# Allegro board pc049a_toplevel_01.brd
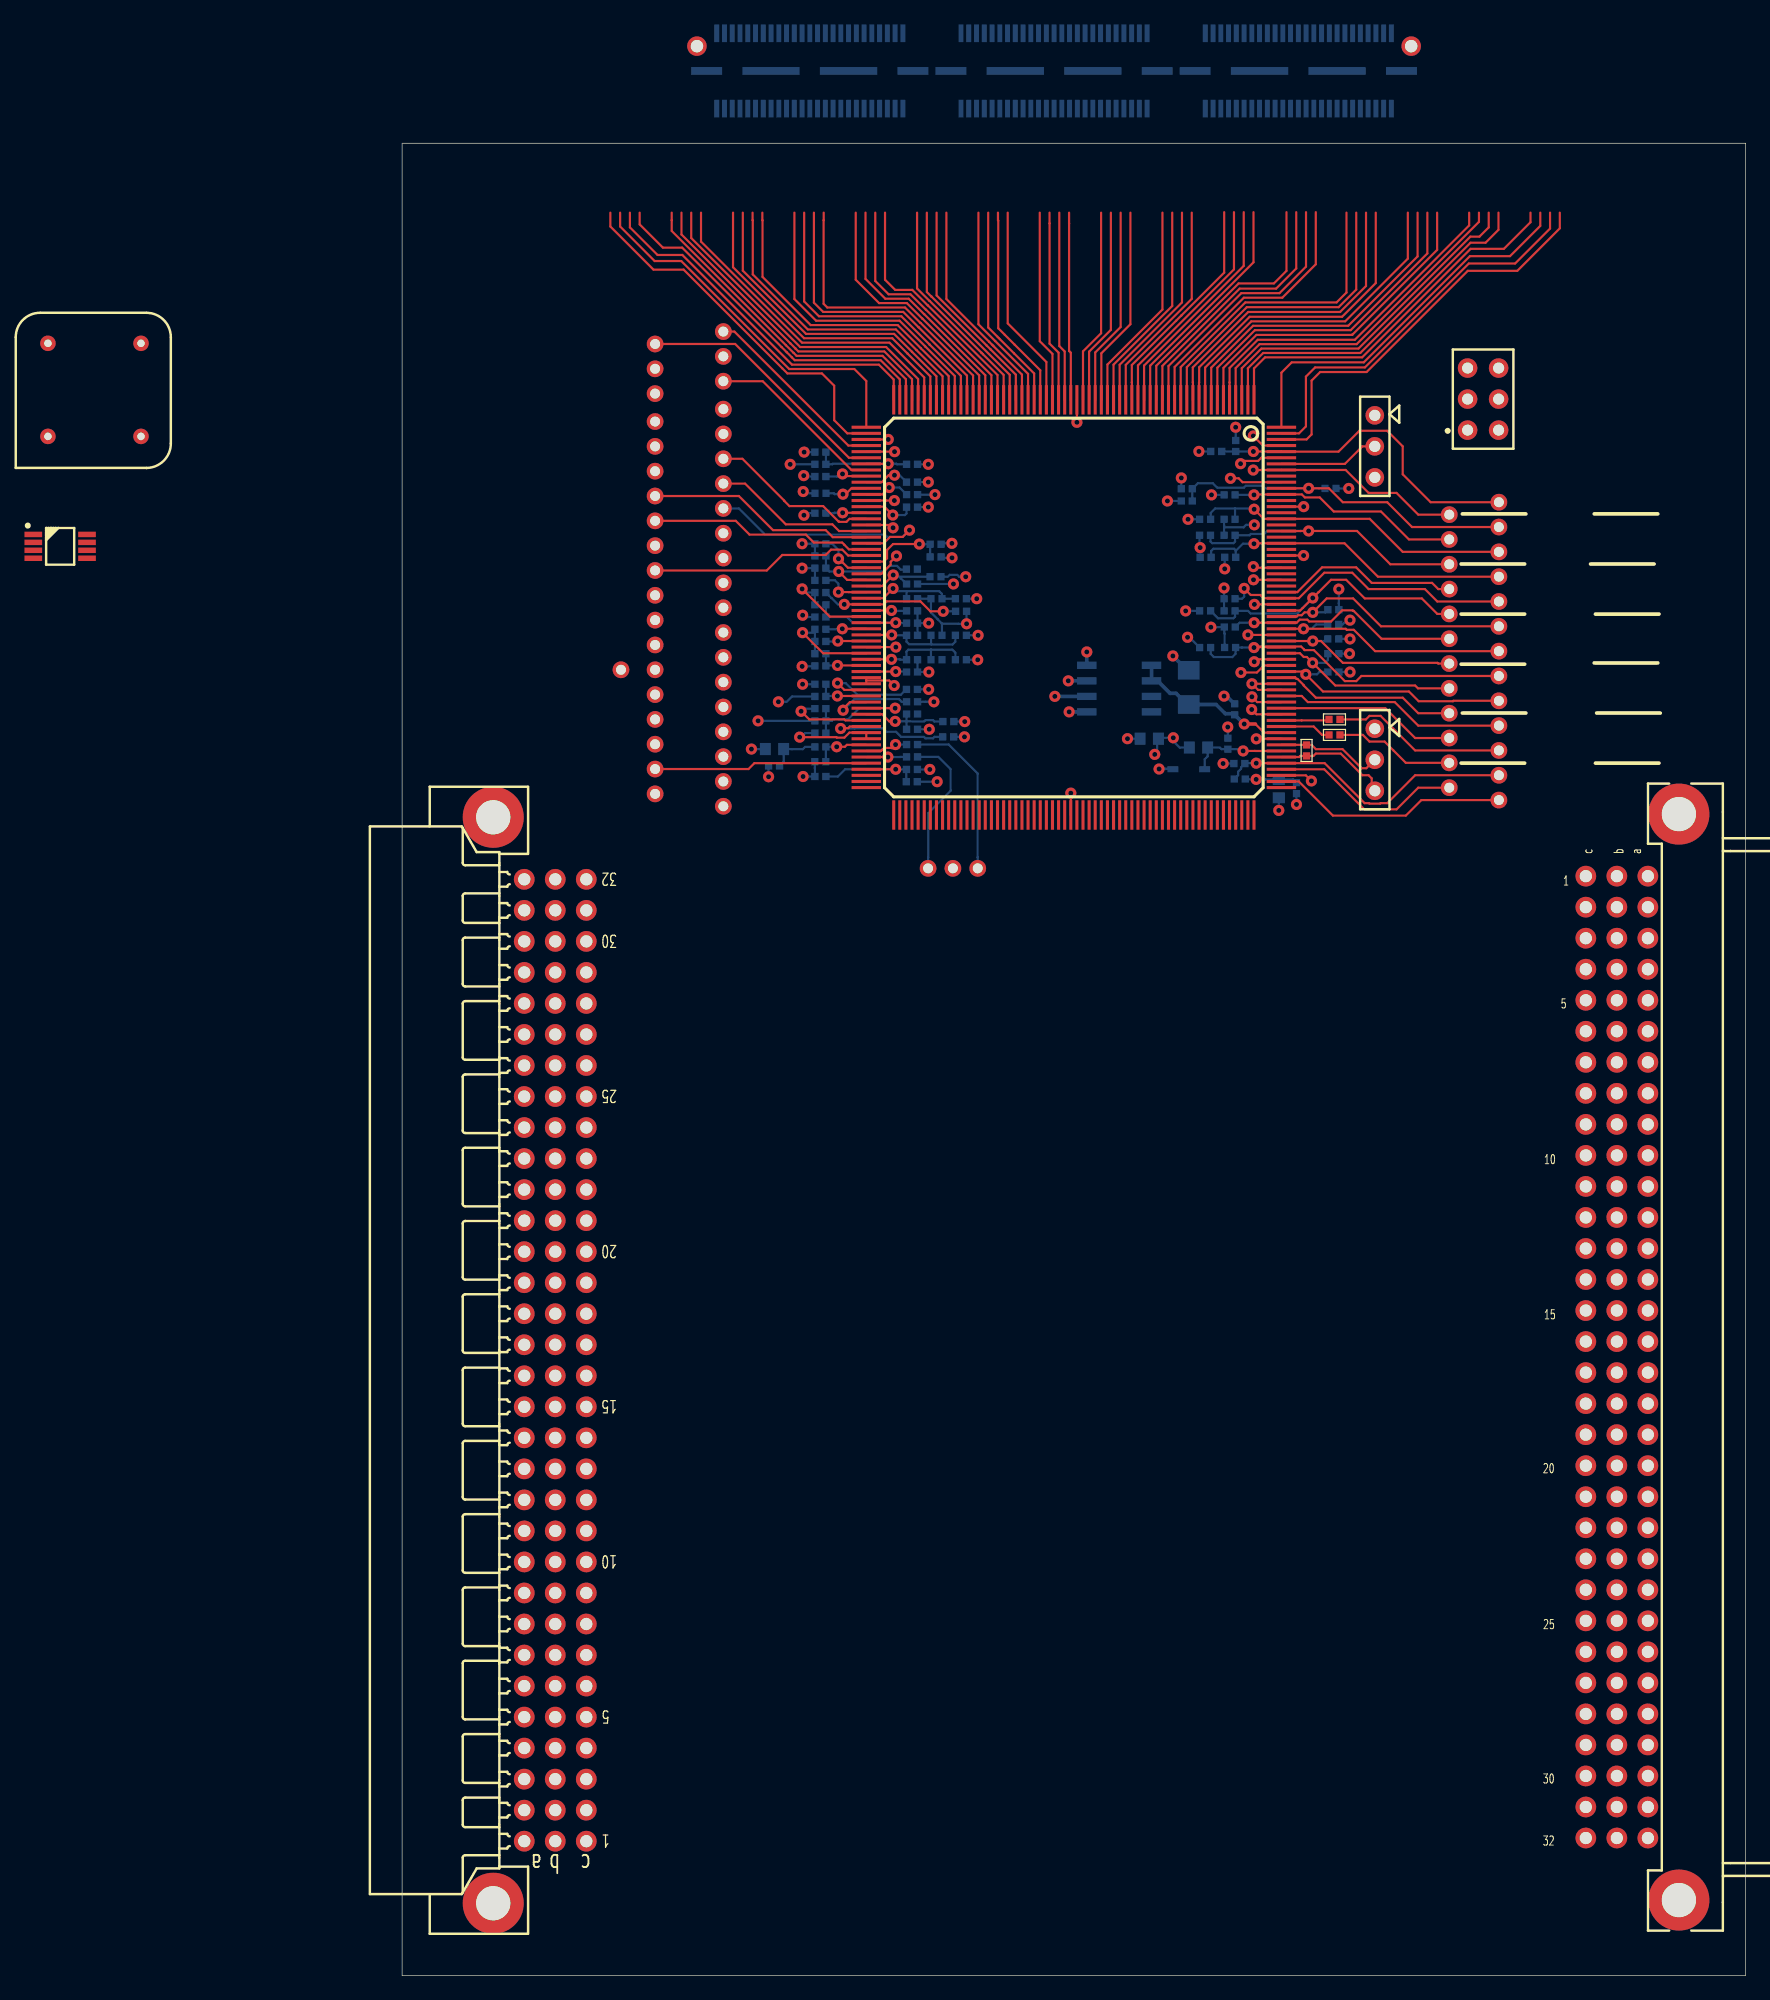
[diagram p0: board, top side]
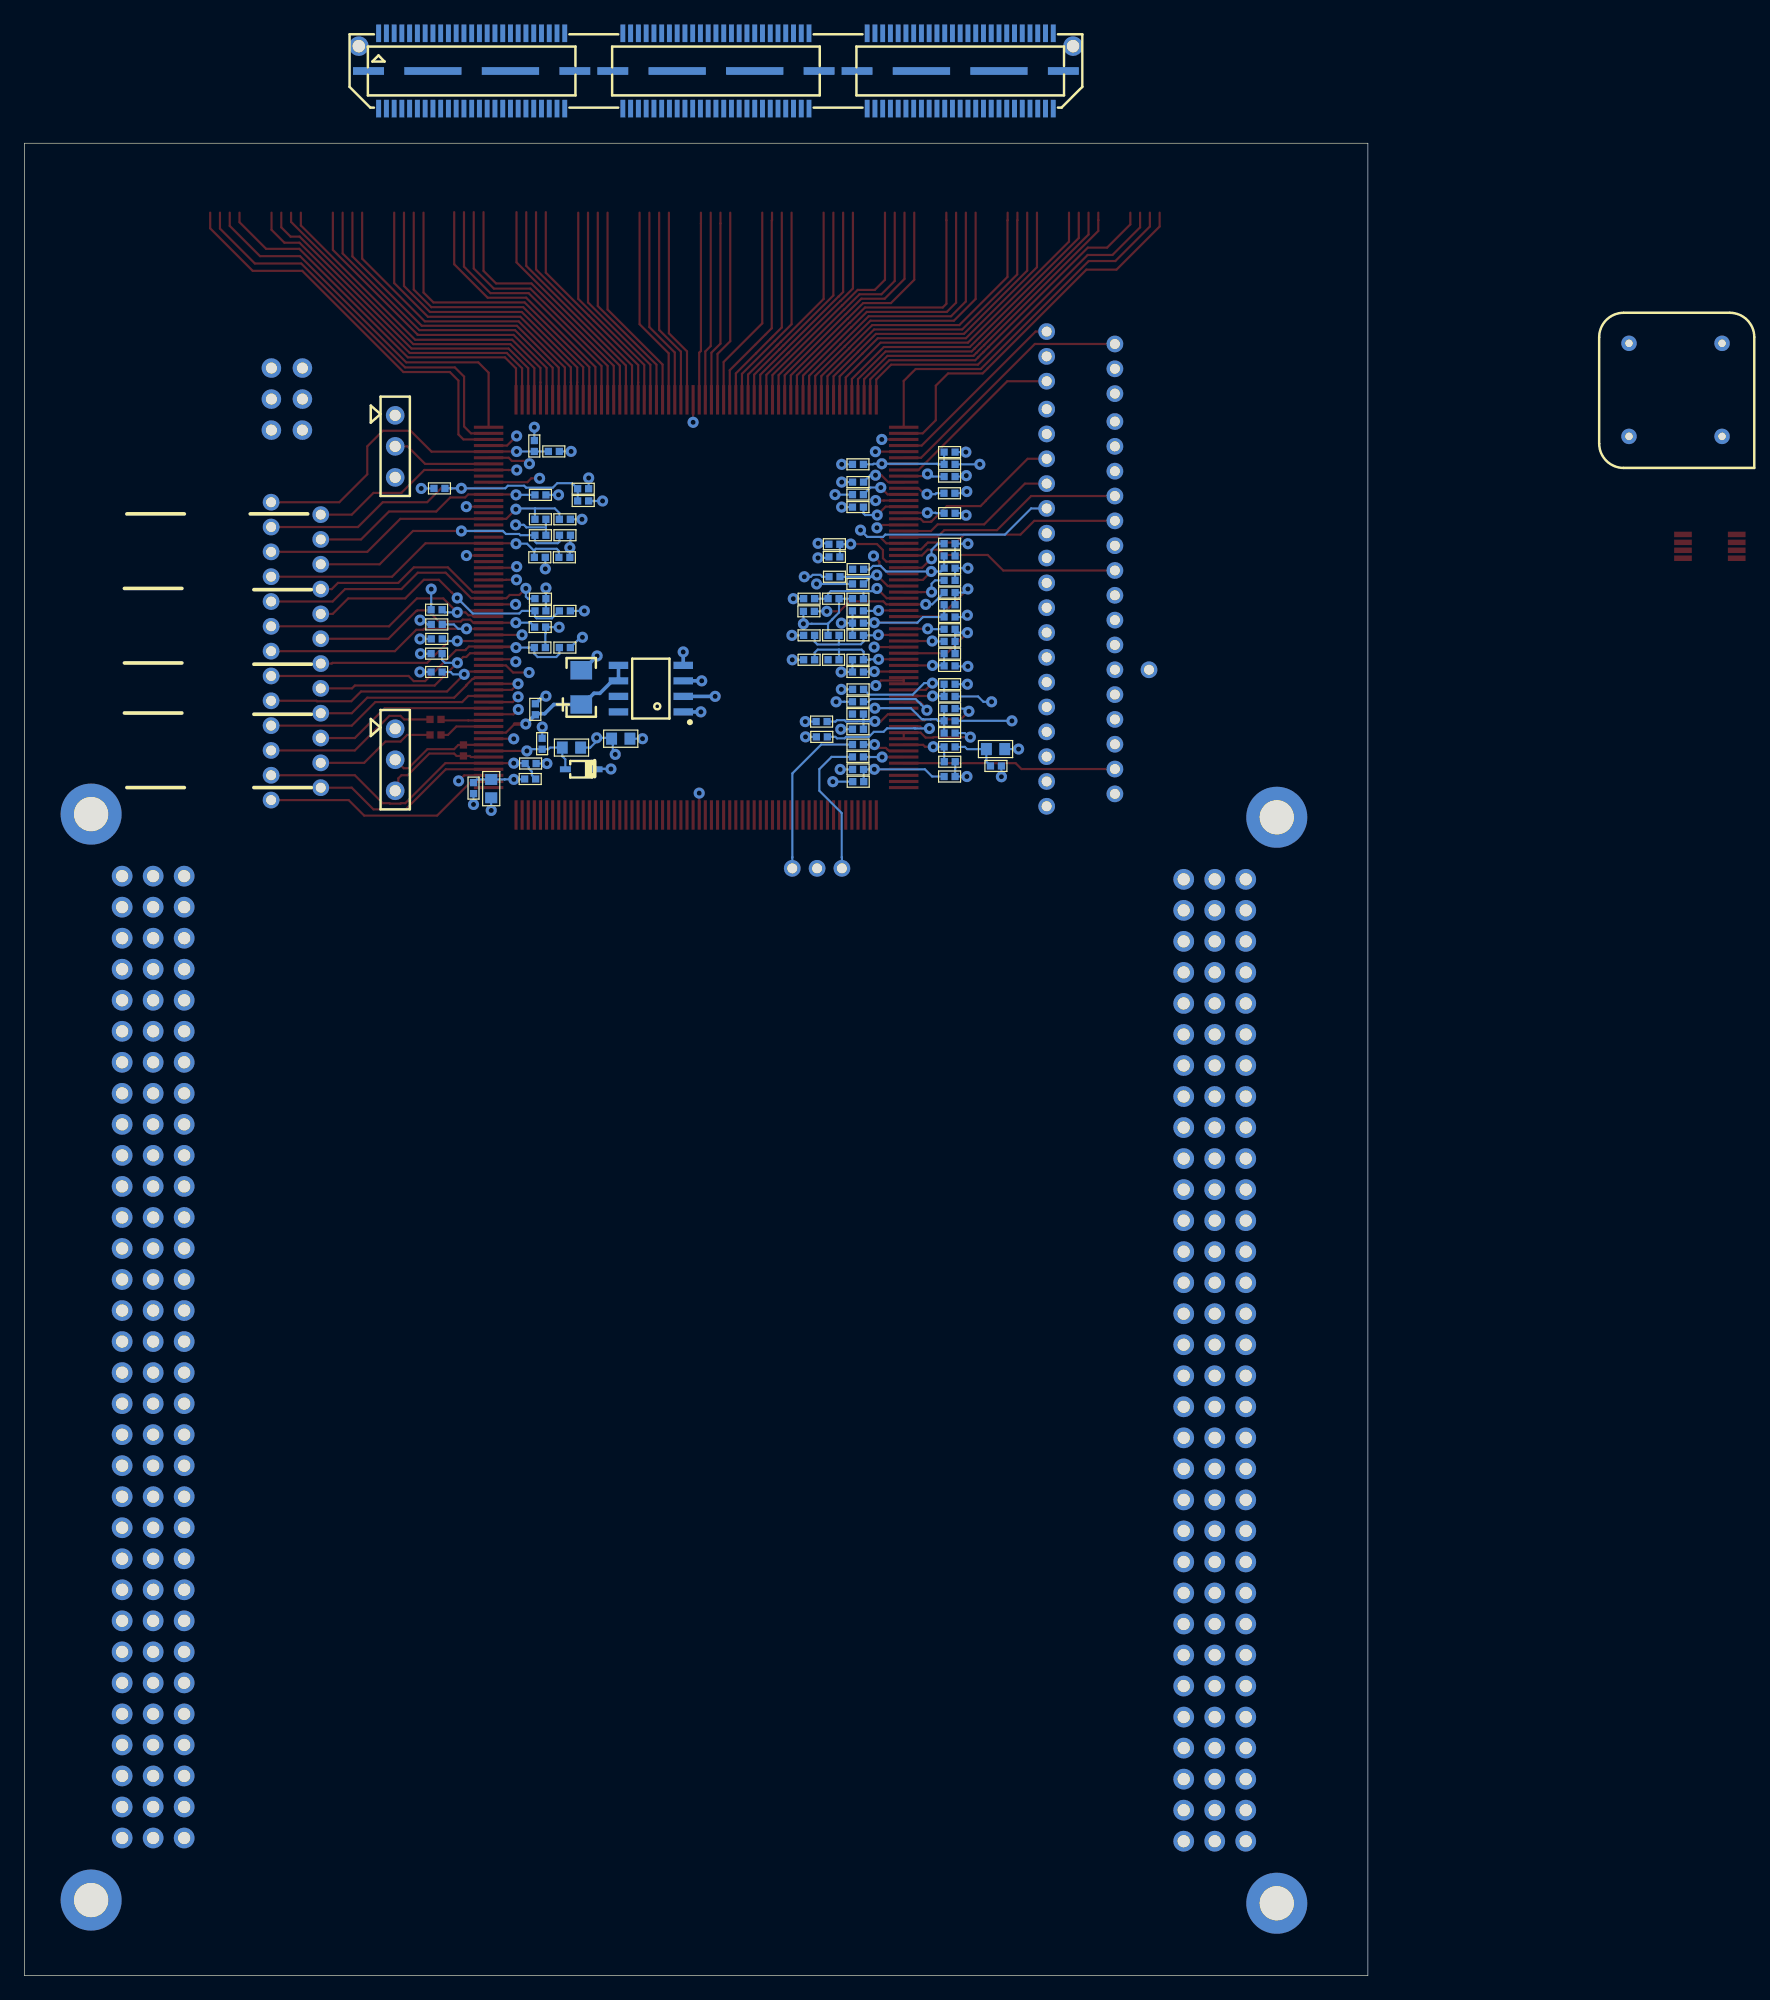
[diagram p1: board, bottom side, seen from below]

Outline 110 x 150 mm; copper layers: TOP, L2, L3, L4, L5, BOTTOM. Coordinates in mm from the lower left corner of the outline.
Outline path: 0,150 110,150 110,0 0,0 0,150

## Design rules (mm)
net group OR: nets OR<0>_1 OR<1>_1
net group ANALOG_TO_MAROC: nets ANALOG_TO_MAROC<0> ANALOG_TO_MAROC<1> ANALOG_TO_MAROC<2> ANALOG_TO_MAROC<3> ANALOG_TO_MAROC<4> ANALOG_TO_MAROC<5> ANALOG_TO_MAROC<6> ANALOG_TO_MAROC<7> ANALOG_TO_MAROC<8> ANALOG_TO_MAROC<9> ANALOG_TO_MAROC<10> ANALOG_TO_MAROC<11> ANALOG_TO_MAROC<12> ANALOG_TO_MAROC<13> ANALOG_TO_MAROC<14> ANALOG_TO_MAROC<15> ANALOG_TO_MAROC<16> ANALOG_TO_MAROC<17> ANALOG_TO_MAROC<18> ANALOG_TO_MAROC<19> ANALOG_TO_MAROC<20> ANALOG_TO_MAROC<21> ANALOG_TO_MAROC<22> ANALOG_TO_MAROC<23> ANALOG_TO_MAROC<24> ANALOG_TO_MAROC<25> ANALOG_TO_MAROC<26> ANALOG_TO_MAROC<27> ANALOG_TO_MAROC<28> ANALOG_TO_MAROC<29> ANALOG_TO_MAROC<30> ANALOG_TO_MAROC<31> ANALOG_TO_MAROC<32> ANALOG_TO_MAROC<33> ANALOG_TO_MAROC<34> ANALOG_TO_MAROC<35> ANALOG_TO_MAROC<36> ANALOG_TO_MAROC<37> ANALOG_TO_MAROC<38> ANALOG_TO_MAROC<39> ANALOG_TO_MAROC<40> ANALOG_TO_MAROC<41> ANALOG_TO_MAROC<42> ANALOG_TO_MAROC<43> ANALOG_TO_MAROC<44> ANALOG_TO_MAROC<45> ANALOG_TO_MAROC<46> ANALOG_TO_MAROC<47> ANALOG_TO_MAROC<48> ANALOG_TO_MAROC<49> ANALOG_TO_MAROC<50> ANALOG_TO_MAROC<51> ANALOG_TO_MAROC<52> ANALOG_TO_MAROC<53> ANALOG_TO_MAROC<54> ANALOG_TO_MAROC<55> ANALOG_TO_MAROC<56> ANALOG_TO_MAROC<57> ANALOG_TO_MAROC<58> ANALOG_TO_MAROC<59> ANALOG_TO_MAROC<60> ANALOG_TO_MAROC<61> ANALOG_TO_MAROC<62> ANALOG_TO_MAROC<63>
net group LVDS_DIN_N: nets LVDS_DIN_N<0> LVDS_DIN_N<1> LVDS_DIN_N<2> LVDS_DIN_N<3> LVDS_DIN_N<4> LVDS_DIN_N<5> LVDS_DIN_N<6> LVDS_DIN_N<7> LVDS_DIN_N<8> LVDS_DIN_N<9> LVDS_DIN_N<10> LVDS_DIN_N<11> LVDS_DIN_N<12> LVDS_DIN_N<13> LVDS_DIN_N<14> LVDS_DIN_N<15>
net group LVDS_DIN_P: nets LVDS_DIN_P<0> LVDS_DIN_P<1> LVDS_DIN_P<2> LVDS_DIN_P<3> LVDS_DIN_P<4> LVDS_DIN_P<5> LVDS_DIN_P<6> LVDS_DIN_P<7> LVDS_DIN_P<8> LVDS_DIN_P<9> LVDS_DIN_P<10> LVDS_DIN_P<11> LVDS_DIN_P<12> LVDS_DIN_P<13> LVDS_DIN_P<14> LVDS_DIN_P<15>
net group SUM: nets SUM<1>_1 SUM<2>_1 SUM<3>_1 SUM<4>_1 SUM<5>_1 SUM<6>_1 SUM<7>_1 SUM<8>_1
net group TRIG: nets TRIG<0>_1 TRIG<1>_1 TRIG<2>_1 TRIG<3>_1 TRIG<4>_1 TRIG<5>_1 TRIG<6>_1 TRIG<7>_1 TRIG<8>_1 TRIG<9>_1 TRIG<10>_1 TRIG<11>_1 TRIG<12>_1 TRIG<13>_1 TRIG<14>_1 TRIG<15>_1 TRIG<16>_1 TRIG<17>_1 TRIG<18>_1 TRIG<19>_1 TRIG<20>_1 TRIG<21>_1 TRIG<22>_1 TRIG<23>_1 TRIG<24>_1 TRIG<25>_1 TRIG<26>_1 TRIG<27>_1 TRIG<28>_1 TRIG<29>_1 TRIG<30>_1 TRIG<31>_1 TRIG<32>_1 TRIG<33>_1 TRIG<34>_1 TRIG<35>_1 TRIG<36>_1 TRIG<37>_1 TRIG<38>_1 TRIG<39>_1 TRIG<40>_1 TRIG<41>_1 TRIG<42>_1 TRIG<43>_1 TRIG<44>_1 TRIG<45>_1 TRIG<46>_1 TRIG<47>_1 TRIG<48>_1 TRIG<49>_1 TRIG<50>_1 TRIG<51>_1 TRIG<52>_1 TRIG<53>_1 TRIG<54>_1 TRIG<55>_1 TRIG<56>_1 TRIG<57>_1 TRIG<58>_1 TRIG<59>_1 TRIG<60>_1 TRIG<61>_1 TRIG<62>_1 TRIG<63>_1

## Placement (name value [footprint] x y rotation side)
C1_1  100nF  [C0402]  68.56 99.22 180 bottom
C2_1  100nF  [C0402]  34.24 99.37 0 bottom
C3_1  100nF  [C0402]  43.67 114.51 180 bottom
C4_1  100nF  [C0402]  68.25 125.21 270 bottom
C5_1  100nF  [C0402]  67.75 119.21 0 bottom
C6_1  100nF  [C0402]  34.25 124.71 0 bottom
C7_1  100nF  [C0402]  67.75 117.91 0 bottom
C8_1  100nF  [C0402]  34.25 123.71 0 bottom
C9_1  100nF  [C0402]  43.68 116.13 180 bottom
C10_1  100nF  [C0402]  67.8 116.1 0 bottom
C11_1  100nF  [C0402]  34.25 108.21 0 bottom
C12_1  100nF  [C0402]  67.75 111.71 0 bottom
C13_1  100nF  [C0402]  34.25 113.21 0 bottom
C14_1  100nF  [C0402]  34.25 105.71 0 bottom
C15_1  100nF  [C0402]  34.25 103.71 0 bottom
C16_1  100nF  [C0402]  67.79 108.72 0 bottom
C17_1  100nF  [C0402]  34.25 101.71 0 bottom
C18_1  100nF  [C0402]  34.25 122.71 0 bottom
C19_1  100nF  [C0402]  41.75 107.71 180 bottom
C20_1  100nF  [C0402]  34.25 119.71 0 bottom
C21_1  100nF  [C0402]  41.75 109.71 180 bottom
C22_1  100nF  [C0402]  34.25 114.21 0 bottom
C23_1  100nF  [C0402]  67.77 110.39 0 bottom
C24_1  100nF  [C0402]  34.25 116.21 0 bottom
C25_1  100nF  [C0402]  76.25 106.71 180 bottom
C26_1  100nF  [C0402]  34.25 109.21 0 bottom
C27_1  100nF  [C0402]  41.75 111.71 180 bottom
C28_1  100nF  [C0402]  41.75 120.21 180 bottom
C29_1  100nF  [C0402]  41.75 112.71 0 bottom
C30_1  100nF  [C0402]  41.75 104.27 180 bottom
C31_1  100nF  [C0402]  76.25 111.81 180 bottom
C32_1  100nF  [C0402]  41.75 122.26 180 bottom
C33_1  100nF  [C0402]  41.75 110.71 180 bottom
C34_1  100nF  [C0402]  44.73 102.65 180 bottom
C35_1  100nF  [C0402]  67.75 112.71 0 bottom
C36_1  100nF  [C0402]  41.76 121.23 180 bottom
C37_1  100nF  [C0402]  76.25 108.21 180 bottom
C38_1  100nF  [C0402]  76.02 121.74 180 bottom
C39_1  100nF  [C0402]  34.26 121.34 0 bottom
C40_1  100nF  [C0402]  34.25 117.21 0 bottom
C41_1  100nF  [C0402]  41.75 106.71 180 bottom
C42_1  100nF  [C0402]  76.24 110.6 180 bottom
C43_1  100nF  [C0402]  67.75 121.21 0 bottom
C44_1  100nF  [C0402]  41.74 98.74 180 bottom
C45_1  100nF  [C0402]  41.74 105.29 180 bottom
C46_1  100nF  [C0402]  76.24 109.42 180 bottom
C47_1  100nF  [C0402]  34.25 110.21 0 bottom
C48_1  22uF  [C3216POL]  64.41 104.05 90 bottom
C50_1  100nF  [C0402]  67.61 100.84 270 bottom
C51_1  100nF  [C0402]  68.17 103.66 270 bottom
C52_1  10uF  [C0603]  71.78 97.17 90 bottom
C53_1  10uF  [C0603]  30.49 100.4 0 bottom
C54_1  10uF  [C0603]  61.17 101.25 0 bottom
D1_1  -  [SOD323_INV]  64.41 98.75 180 bottom
IC1  -  [SOP65P490X95-8N]  -28 117 0 top
J1  -  [CON150_QTSDA]  81 159 90 bottom
J1_1  -  [SAMTEC_SSW-103-01-G-D]  88.51 129.05 270 top
J2  -  [HARTING_0903196X921]  10 11 180 top
J3  -  [HARTING_09732966801]  102 90 0 top
J3_1  -  [CONHE13D3X1M]  79.64 102.07 270 top
J4_1  -  [CONHE13D3X1M]  79.64 127.72 270 top
LK1_1  -  [1-HOLE_0-8P]  89.8 98.26 0 top
LK2_1  -  [1-HOLE_0-8P]  26.3 99.78 0 top
LK3_1  -  [1-HOLE_0-8P]  20.71 123.15 0 top
LK4_1  -  [1-HOLE_0-8P]  89.8 120.61 0 top
LK5_1  -  [1-HOLE_0-8P]  89.8 116.55 0 top
LK6_1  -  [1-HOLE_0-8P]  85.74 119.6 0 top
LK7_1  -  [1-HOLE_0-8P]  85.74 115.53 0 top
LK8_1  -  [1-HOLE_0-8P]  20.71 125.18 0 top
LK9_1  -  [1-HOLE_0-8P]  89.8 114.52 0 top
LK10_1  -  [1-HOLE_0-8P]  85.74 111.47 0 top
LK11_1  -  [1-HOLE_0-8P]  20.71 112.99 0 top
LK12_1  -  [1-HOLE_0-8P]  26.3 105.88 0 top
LK13_1  -  [1-HOLE_0-8P]  89.8 106.39 0 top
LK14_1  -  [1-HOLE_0-8P]  20.71 102.83 0 top
LK15_1  -  [1-HOLE_0-8P]  26.3 97.75 0 top
LK16_1  -  [1-HOLE_0-8P]  26.3 128.23 0 top
LK17_1  -  [1-HOLE_0-8P]  20.71 104.86 0 top
LK18_1  -  [1-HOLE_0-8P]  26.3 126.2 0 top
LK19_1  -  [1-HOLE_0-8P]  26.3 107.91 0 top
LK20_1  -  [1-HOLE_0-8P]  26.3 114.01 0 top
LK21_1  -  [1-HOLE_0-8P]  85.74 109.44 0 top
LK22_1  -  [1-HOLE_0-8P]  20.71 117.06 0 top
LK23_1  -  [1-HOLE_0-8P]  89.8 104.36 0 top
LK24_1  -  [1-HOLE_0-8P]  20.71 108.93 0 top
LK25_1  -  [1-HOLE_0-8P]  26.3 111.98 0 top
LK26_1  -  [1-HOLE_0-8P]  89.8 96.23 0 top
LK27_1  -  [1-HOLE_0-8P]  20.71 106.9 0 top
LK28_1  -  [1-HOLE_0-8P]  89.8 102.32 0 top
LK29_1  -  [1-HOLE_0-8P]  85.74 101.31 0 top
LK30_1  -  [1-HOLE_0-8P]  17.92 106.9 0 top
LK31_1  -  [1-HOLE_0-8P]  20.71 129.5 0 top
LK32_1  -  [1-HOLE_0-8P]  26.3 116.04 0 top
LK33_1  -  [1-HOLE_0-8P]  26.3 101.82 0 top
LK34_1  -  [1-HOLE_0-8P]  89.8 110.45 0 top
LK35_1  -  [1-HOLE_0-8P]  26.3 132.55 0 top
LK36_1  -  [1-HOLE_0-8P]  20.71 110.96 0 top
LK37_1  -  [1-HOLE_0-8P]  20.71 96.74 0 top
LK38_1  -  [1-HOLE_0-8P]  89.8 112.48 0 top
LK39_1  -  [1-HOLE_0-8P]  20.71 131.53 0 top
LK40_1  -  [1-HOLE_0-8P]  85.74 105.37 0 top
LK41_1  -  [1-HOLE_0-8P]  89.8 118.58 0 top
LK42_1  -  [1-HOLE_0-8P]  20.71 127.22 0 top
LK43_1  -  [1-HOLE_0-8P]  26.3 118.07 0 top
LK44_1  -  [1-HOLE_0-8P]  20.71 100.8 0 top
LK45_1  -  [1-HOLE_0-8P]  89.8 108.42 0 top
LK46_1  -  [1-HOLE_0-8P]  85.74 117.56 0 top
LK47_1  -  [1-HOLE_0-8P]  26.3 95.72 0 top
LK48_1  -  [1-HOLE_0-8P]  26.3 103.85 0 top
LK49_1  -  [1-HOLE_0-8P]  85.74 107.4 0 top
LK50_1  -  [1-HOLE_0-8P]  26.3 109.94 0 top
LK51_1  -  [1-HOLE_0-8P]  85.74 99.28 0 top
LK52_1  -  [1-HOLE_0-8P]  89.8 100.29 0 top
LK53_1  -  [1-HOLE_0-8P]  26.3 120.1 0 top
LK54_1  -  [1-HOLE_0-8P]  43.07 90.64 0 top
LK55_1  -  [1-HOLE_0-8P]  45.1 90.64 0 top
LK56_1  -  [1-HOLE_0-8P]  47.13 90.64 0 top
LK57_1  -  [1-HOLE_0-8P]  26.3 130.52 0 top
LK58_1  -  [1-HOLE_0-8P]  85.74 113.5 0 top
LK59_1  -  [1-HOLE_0-8P]  20.71 98.77 0 top
LK60_1  -  [1-HOLE_0-8P]  26.3 134.58 0 top
LK61_1  -  [1-HOLE_0-8P]  26.3 124.17 0 top
LK62_1  -  [1-HOLE_0-8P]  20.71 121.12 0 top
LK63_1  -  [1-HOLE_0-8P]  85.74 103.34 0 top
LK64_1  -  [1-HOLE_0-8P]  26.3 122.14 0 top
LK65_1  -  [1-HOLE_0-8P]  20.71 119.09 0 top
LK66_1  -  [1-HOLE_0-8P]  20.71 133.57 0 top
LK67_1  -  [1-HOLE_0-8P]  20.71 115.02 0 top
LK68_1  -  [1-HOLE_0-8P]  85.74 97.24 0 top
QZ1  25MHz  [QZ_KTH039C]  -29 126 0 top
R1_1  51  [C0402]  76.34 101.56 0 top
R2_1  51  [C0402]  76.34 102.83 0 top
R3_1  10  [C0402]  68.59 97.95 180 bottom
R4_1  10  [C0402]  34.25 100.58 0 bottom
R5_1  10  [C0402]  41.75 113.92 0 bottom
R6_1  10  [C0402]  66.65 124.77 180 bottom
R7_1  10  [C0402]  65.75 119.21 180 bottom
R8_1  10  [C0402]  41.75 123.71 0 bottom
R9_1  10  [C0402]  65.74 117.91 180 bottom
R10_1  10  [C0402]  43.68 117.17 0 bottom
R11_1  10  [C0402]  65.79 116.1 180 bottom
R12_1  10  [C0402]  34.25 107.21 180 bottom
R13_1  10  [C0402]  65.75 111.71 180 bottom
R14_1  100  [C0402]  45.77 111.68 0 bottom
R15_1  10  [C0402]  34.25 104.71 180 bottom
R16_1  10  [C0402]  34.25 102.71 180 bottom
R17_1  100  [C0402]  65.75 108.71 180 bottom
R18_1  51  [C0402]  41.75 99.76 180 bottom
R19_1  51  [C0402]  41.75 100.77 180 bottom
R20_1  XX  [C0402]  43.75 107.71 0 bottom
R21_1  XX  [C0402]  45.75 107.71 180 bottom
R22_1  XX  [C0402]  43.75 109.71 0 bottom
R23_1  XX  [C0402]  45.75 109.71 180 bottom
R24_1  100  [C0402]  74.05 100.29 270 top
R25_1  XX  [C0402]  41.74 115.13 0 bottom
R26_1  XX  [C0402]  34.25 115.21 0 bottom
R27_1  1k  [C0402]  44.71 101.4 0 bottom
R28_1  XX  [C0402]  43.75 112.71 180 bottom
R29_1  XX  [C0402]  45.75 112.71 180 bottom
R30_1  XX  [C0402]  34.25 111.21 180 bottom
R31_1  XX  [C0402]  34.25 112.21 0 bottom
R32_1  XX  [C0402]  41.75 103.27 0 bottom
R33_1  XX  [C0402]  41.75 102.02 180 bottom
R34_1  XX  [C0402]  64.25 121.71 180 bottom
R35_1  XX  [C0402]  64.25 120.71 0 bottom
R36_1  XX  [C0402]  41.73 97.73 0 bottom
R37_1  XX  [C0402]  34.25 98.16 0 bottom
R42_1  82  [C0603]  65.21 100.52 180 bottom
R46_1  3.3  [C0402]  73.23 97.2 90 bottom
R47_1  3.3  [C0402]  30.46 99.02 0 bottom
RG1_1  2.5V  [SOIC127P600X175-8N]  58.71 105.35 0 bottom
U1_1  -  [PQFP240_050]  69.75 128.99 270 top

## Library data of the parts
C1_1 C2_1 C3_1 C4_1 C5_1 C6_1 C7_1 C8_1 C9_1 C10_1 C11_1 C12_1 C13_1 C14_1 C15_1 C16_1 C17_1 C18_1 C19_1 C20_1 C21_1 C22_1 C23_1 C24_1 C25_1 C26_1 C27_1 C28_1 C29_1 C30_1 C31_1 C32_1 C33_1 C34_1 C35_1 C36_1 C37_1 C38_1 C39_1 C40_1 C41_1 C42_1 C43_1 C44_1 C45_1 C46_1 C47_1 C50_1 C51_1 = CAPCERSMDCL2: part number: CAPCERSMDCL2_0402-100NF,16V_GEN; tolerance: 10%
C48_1 = ELCAPTAN: part number: ELCAPTAN_SMD_A-22UF,6.3V
C52_1 C53_1 C54_1 = CAPCERSMDCL2: part number: CAPCERSMDCL2_0603-10UF_X5R,6.3V; tolerance: 5%
D1_1 = DIODE_CA: part number: DIODE_CA_SCHOTTKY-RB751V40T1
IC1 = AD5662: part number: AD5662BRMZ-1
J1 = CON150P: part number: CON150P-QTS75_03FDA
J1_1 = CON6P: part number: CON6P-SSW-103-01-G-D
J2 = CONABC96: part number: CONABC96-09 03 196 6921
J3 = CONABC96: part number: CONABC96-09 73 296 6801
J3_1 J4_1 = CON3P: part number: CON3P-SIL254D
LK1_1 LK2_1 LK3_1 LK4_1 LK5_1 LK6_1 LK7_1 LK8_1 LK9_1 LK10_1 LK11_1 LK12_1 LK13_1 LK14_1 LK15_1 LK16_1 LK17_1 LK18_1 LK19_1 LK20_1 LK21_1 LK22_1 LK23_1 LK24_1 LK25_1 LK26_1 LK27_1 LK28_1 LK29_1 LK30_1 LK31_1 LK32_1 LK33_1 LK34_1 LK35_1 LK36_1 LK37_1 LK38_1 LK39_1 LK40_1 LK41_1 LK42_1 LK43_1 LK44_1 LK45_1 LK46_1 LK47_1 LK48_1 LK49_1 LK50_1 LK51_1 LK52_1 LK53_1 LK54_1 LK55_1 LK56_1 LK57_1 LK58_1 LK59_1 LK60_1 LK61_1 LK62_1 LK63_1 LK64_1 LK65_1 LK66_1 LK67_1 LK68_1 = 1-HOLE: part number: 1-HOLE_0-8-BASE
QZ1 = OSCILQUARTZ: part number: OSCILQUARTZ-25MHZ
R1_1 R2_1 R18_1 R19_1 = RSMD0402: part number: RSMD0402_1/16W-51,1%; tolerance: 1%
R3_1 R4_1 R5_1 R6_1 R7_1 R8_1 R9_1 R10_1 R11_1 R12_1 R13_1 R15_1 R16_1 = RSMD0402: part number: RSMD0402_1/16W-10R,5%; tolerance: 5%
R14_1 R17_1 = RSMD0402: part number: RSMD0402_1/16W-100,0.1%_GEN; tolerance: 0.1%
R20_1 R21_1 R22_1 R23_1 R25_1 R26_1 R28_1 R29_1 R30_1 R31_1 R32_1 R33_1 R34_1 R35_1 R36_1 R37_1 = RSMD0402: part number: RSMD0402_0.0625W-XX,1%; tolerance: 1%
R24_1 = RSMD0402: part number: RSMD0402_1/16W-100,1%; tolerance: 1%
R27_1 = RSMD0402: part number: RSMD0402_1/16W-1K,5%; tolerance: 5%
R42_1 = RSMD0603: part number: RSMD0603_1/10W-82,1%; tolerance: 1%
R46_1 R47_1 = RSMD0402: part number: RSMD0402_1/16W-3.3R,5%; tolerance: 5%
RG1_1 = TPS776XX: part number: TPS77625D
U1_1 = MAROC3: part number: MAROC3_PQFP-IN2P3

## Footprints (pads in the part's own frame, mm; a bottom-side part is the same pattern mirrored in y, then rotated)
1-HOLE_0-8P
  round 1.372 hole 0.813: 1(0,0)
C0402
  rect 0.6x0.6 smd: 1(-0.45,0) 2(0.45,0)
C0603
  rect 0.9x1 smd: 1(-0.75,0) 2(0.75,0)
C3216POL
  rect 1.524x1.778 smd: 1(0,0) 2(2.8,0)
CON150_QTSDA
  round 1.6 hole 1.016: (-1.054,-56.861) (-1.054,1.622)
  rect 1.448x0.406 smd: 1(0,0) 2(-6.17,0) 3(0,-0.635) 4(-6.17,-0.635) 5(0,-1.27) 6(-6.17,-1.27) 7(0,-1.905) 8(-6.17,-1.905) 9(0,-2.54) 10(-6.17,-2.54) 11(0,-3.175) 12(-6.17,-3.175) 13(0,-3.81) 14(-6.17,-3.81) 15(0,-4.445) 16(-6.17,-4.445) 17(0,-5.08) 18(-6.17,-5.08) 19(0,-5.715) 20(-6.17,-5.715) 21(0,-6.35) 22(-6.17,-6.35) 23(0,-6.985) 24(-6.17,-6.985) 25(0,-7.62) 26(-6.17,-7.62) 27(0,-8.255) 28(-6.17,-8.255) 29(0,-8.89) 30(-6.17,-8.89) 31(0,-9.525) 32(-6.17,-9.525) 33(0,-10.16) 34(-6.17,-10.16) 35(0,-10.795) 36(-6.17,-10.795) 37(0,-11.43) 38(-6.17,-11.43) 39(0,-12.065) 40(-6.17,-12.065) 41(0,-12.7) 42(-6.17,-12.7) 43(0,-13.335) 44(-6.17,-13.335) 45(0,-13.97) 46(-6.17,-13.97) 47(0,-14.605) 48(-6.17,-14.605) 49(0,-15.24) 50(-6.17,-15.24) 51(0,-20) 52(-6.17,-20) 53(0,-20.635) 54(-6.17,-20.635) 55(0,-21.27) 56(-6.17,-21.27) 57(0,-21.905) 58(-6.17,-21.905) 59(0,-22.54) 60(-6.17,-22.54) 61(0,-23.175) 62(-6.17,-23.175) 63(0,-23.81) 64(-6.17,-23.81) 65(0,-24.445) 66(-6.17,-24.445) 67(0,-25.08) 68(-6.17,-25.08) 69(0,-25.715) 70(-6.17,-25.715) 71(0,-26.35) 72(-6.17,-26.35) 73(0,-26.985) 74(-6.17,-26.985) 75(0,-27.62) 76(-6.17,-27.62) 77(0,-28.255) 78(-6.17,-28.255) 79(0,-28.89) 80(-6.17,-28.89) 81(0,-29.525) 82(-6.17,-29.525) 83(0,-30.16) 84(-6.17,-30.16) 85(0,-30.795) 86(-6.17,-30.795) 87(0,-31.43) 88(-6.17,-31.43) 89(0,-32.065) 90(-6.17,-32.065) 91(0,-32.7) 92(-6.17,-32.7) 93(0,-33.335) 94(-6.17,-33.335) 95(0,-33.97) 96(-6.17,-33.97) 97(0,-34.605) 98(-6.17,-34.605) 99(0,-35.24) 100(-6.17,-35.24) 101(0,-40) 102(-6.17,-40) 103(0,-40.635) 104(-6.17,-40.635) 105(0,-41.27) 106(-6.17,-41.27) 107(0,-41.905) 108(-6.17,-41.905) 109(0,-42.54) 110(-6.17,-42.54) 111(0,-43.175) 112(-6.17,-43.175) 113(0,-43.81) 114(-6.17,-43.81) 115(0,-44.445) 116(-6.17,-44.445) 117(0,-45.08) 118(-6.17,-45.08) 119(0,-45.715) 120(-6.17,-45.715) 121(0,-46.35) 122(-6.17,-46.35) 123(0,-46.985) 124(-6.17,-46.985) 125(0,-47.62) 126(-6.17,-47.62) 127(0,-48.255) 128(-6.17,-48.255) 129(0,-48.89) 130(-6.17,-48.89) 131(0,-49.525) 132(-6.17,-49.525) 133(0,-50.16) 134(-6.17,-50.16) 135(0,-50.795) 136(-6.17,-50.795) 137(0,-51.43) 138(-6.17,-51.43) 139(0,-52.065) 140(-6.17,-52.065) 141(0,-52.7) 142(-6.17,-52.7) 143(0,-53.335) 144(-6.17,-53.335) 145(0,-53.97) 146(-6.17,-53.97) 147(0,-54.605) 148(-6.17,-54.605) 149(0,-55.24) 150(-6.17,-55.24)
  rect 0.635x2.54 smd: 151(-3.086,0.826) 154(-3.086,-16.066) 155(-3.086,-19.174) 158(-3.086,-36.066) 159(-3.086,-39.174) 162(-3.086,-56.066)
  rect 0.635x4.699 smd: 152(-3.086,-4.445) 153(-3.086,-10.795) 156(-3.086,-24.445) 157(-3.086,-30.795) 160(-3.086,-44.445) 161(-3.086,-50.795)
CONHE13D3X1M
  round 1.524 hole 0.914: 1(0,0) 2(2.54,0) 3(5.08,0)
HARTING_0903196X921
  round 5 hole 2.8: 1(2.54,5.08) 2(2.54,-83.82)
  round 1.7 hole 1: A1(0,0) A2(0,-2.54) A3(0,-5.08) A4(0,-7.62) A5(0,-10.16) A6(0,-12.7) A7(0,-15.24) A8(0,-17.78) A9(0,-20.32) A10(0,-22.86) A11(0,-25.4) A12(0,-27.94) A13(0,-30.48) A14(0,-33.02) A15(0,-35.56) A16(0,-38.1) A17(0,-40.64) A18(0,-43.18) A19(0,-45.72) A20(0,-48.26) A21(0,-50.8) A22(0,-53.34) A23(0,-55.88) A24(0,-58.42) A25(0,-60.96) A26(0,-63.5) A27(0,-66.04) A28(0,-68.58) A29(0,-71.12) A30(0,-73.66) A31(0,-76.2) A32(0,-78.74) B1(-2.54,0) B2(-2.54,-2.54) B3(-2.54,-5.08) B4(-2.54,-7.62) B5(-2.54,-10.16) B6(-2.54,-12.7) B7(-2.54,-15.24) B8(-2.54,-17.78) B9(-2.54,-20.32) B10(-2.54,-22.86) B11(-2.54,-25.4) B12(-2.54,-27.94) B13(-2.54,-30.48) B14(-2.54,-33.02) B15(-2.54,-35.56) B16(-2.54,-38.1) B17(-2.54,-40.64) B18(-2.54,-43.18) B19(-2.54,-45.72) B20(-2.54,-48.26) B21(-2.54,-50.8) B22(-2.54,-53.34) B23(-2.54,-55.88) B24(-2.54,-58.42) B25(-2.54,-60.96) B26(-2.54,-63.5) B27(-2.54,-66.04) B28(-2.54,-68.58) B29(-2.54,-71.12) B30(-2.54,-73.66) B31(-2.54,-76.2) B32(-2.54,-78.74) C1(-5.08,0) C2(-5.08,-2.54) C3(-5.08,-5.08) C4(-5.08,-7.62) C5(-5.08,-10.16) C6(-5.08,-12.7) C7(-5.08,-15.24) C8(-5.08,-17.78) C9(-5.08,-20.32) C10(-5.08,-22.86) C11(-5.08,-25.4) C12(-5.08,-27.94) C13(-5.08,-30.48) C14(-5.08,-33.02) C15(-5.08,-35.56) C16(-5.08,-38.1) C17(-5.08,-40.64) C18(-5.08,-43.18) C19(-5.08,-45.72) C20(-5.08,-48.26) C21(-5.08,-50.8) C22(-5.08,-53.34) C23(-5.08,-55.88) C24(-5.08,-58.42) C25(-5.08,-60.96) C26(-5.08,-63.5) C27(-5.08,-66.04) C28(-5.08,-68.58) C29(-5.08,-71.12) C30(-5.08,-73.66) C31(-5.08,-76.2) C32(-5.08,-78.74)
HARTING_09732966801
  round 5 hole 2.8: 1(2.54,5.08) 2(2.54,-83.82)
  round 1.7 hole 1: A1(0,0) A2(0,-2.54) A3(0,-5.08) A4(0,-7.62) A5(0,-10.16) A6(0,-12.7) A7(0,-15.24) A8(0,-17.78) A9(0,-20.32) A10(0,-22.86) A11(0,-25.4) A12(0,-27.94) A13(0,-30.48) A14(0,-33.02) A15(0,-35.56) A16(0,-38.1) A17(0,-40.64) A18(0,-43.18) A19(0,-45.72) A20(0,-48.26) A21(0,-50.8) A22(0,-53.34) A23(0,-55.88) A24(0,-58.42) A25(0,-60.96) A26(0,-63.5) A27(0,-66.04) A28(0,-68.58) A29(0,-71.12) A30(0,-73.66) A31(0,-76.2) A32(0,-78.74) B1(-2.54,0) B2(-2.54,-2.54) B3(-2.54,-5.08) B4(-2.54,-7.62) B5(-2.54,-10.16) B6(-2.54,-12.7) B7(-2.54,-15.24) B8(-2.54,-17.78) B9(-2.54,-20.32) B10(-2.54,-22.86) B11(-2.54,-25.4) B12(-2.54,-27.94) B13(-2.54,-30.48) B14(-2.54,-33.02) B15(-2.54,-35.56) B16(-2.54,-38.1) B17(-2.54,-40.64) B18(-2.54,-43.18) B19(-2.54,-45.72) B20(-2.54,-48.26) B21(-2.54,-50.8) B22(-2.54,-53.34) B23(-2.54,-55.88) B24(-2.54,-58.42) B25(-2.54,-60.96) B26(-2.54,-63.5) B27(-2.54,-66.04) B28(-2.54,-68.58) B29(-2.54,-71.12) B30(-2.54,-73.66) B31(-2.54,-76.2) B32(-2.54,-78.74) C1(-5.08,0) C2(-5.08,-2.54) C3(-5.08,-5.08) C4(-5.08,-7.62) C5(-5.08,-10.16) C6(-5.08,-12.7) C7(-5.08,-15.24) C8(-5.08,-17.78) C9(-5.08,-20.32) C10(-5.08,-22.86) C11(-5.08,-25.4) C12(-5.08,-27.94) C13(-5.08,-30.48) C14(-5.08,-33.02) C15(-5.08,-35.56) C16(-5.08,-38.1) C17(-5.08,-40.64) C18(-5.08,-43.18) C19(-5.08,-45.72) C20(-5.08,-48.26) C21(-5.08,-50.8) C22(-5.08,-53.34) C23(-5.08,-55.88) C24(-5.08,-58.42) C25(-5.08,-60.96) C26(-5.08,-63.5) C27(-5.08,-66.04) C28(-5.08,-68.58) C29(-5.08,-71.12) C30(-5.08,-73.66) C31(-5.08,-76.2) C32(-5.08,-78.74)
PQFP240_050
  rect 2.413x0.254 smd: 1(0,0) 2(0,-0.5) 3(0,-1) 4(0,-1.5) 5(0,-2) 6(0,-2.5) 7(0,-3) 8(0,-3.5) 9(0,-4) 10(0,-4.5) 11(0,-5) 12(0,-5.5) 13(0,-6) 14(0,-6.5) 15(0,-7) 16(0,-7.5) 17(0,-8) 18(0,-8.5) 19(0,-9) 20(0,-9.5) 21(0,-10) 22(0,-10.5) 23(0,-11) 24(0,-11.5) 25(0,-12) 26(0,-12.5) 27(0,-13) 28(0,-13.5) 29(0,-14) 30(0,-14.5) 31(0,-15) 32(0,-15.5) 33(0,-16) 34(0,-16.5) 35(0,-17) 36(0,-17.5) 37(0,-18) 38(0,-18.5) 39(0,-19) 40(0,-19.5) 41(0,-20) 42(0,-20.5) 43(0,-21) 44(0,-21.5) 45(0,-22) 46(0,-22.5) 47(0,-23) 48(0,-23.5) 49(0,-24) 50(0,-24.5) 51(0,-25) 52(0,-25.5) 53(0,-26) 54(0,-26.5) 55(0,-27) 56(0,-27.5) 57(0,-28) 58(0,-28.5) 59(0,-29) 60(0,-29.5) 121(33.987,-29.5) 122(33.987,-29) 123(33.987,-28.5) 124(33.987,-28) 125(33.987,-27.5) 126(33.987,-27) 127(33.987,-26.5) 128(33.987,-26) 129(33.987,-25.5) 130(33.987,-25) 131(33.987,-24.5) 132(33.987,-24) 133(33.987,-23.5) 134(33.987,-23) 135(33.987,-22.5) 136(33.987,-22) 137(33.987,-21.5) 138(33.987,-21) 139(33.987,-20.5) 140(33.987,-20) 141(33.987,-19.5) 142(33.987,-19) 143(33.987,-18.5) 144(33.987,-18) 145(33.987,-17.5) 146(33.987,-17) 147(33.987,-16.5) 148(33.987,-16) 149(33.987,-15.5) 150(33.987,-15) 151(33.987,-14.5) 152(33.987,-14) 153(33.987,-13.5) 154(33.987,-13) 155(33.987,-12.5) 156(33.987,-12) 157(33.987,-11.5) 158(33.987,-11) 159(33.987,-10.5) 160(33.987,-10) 161(33.987,-9.5) 162(33.987,-9) 163(33.987,-8.5) 164(33.987,-8) 165(33.987,-7.5) 166(33.987,-7) 167(33.987,-6.5) 168(33.987,-6) 169(33.987,-5.5) 170(33.987,-5) 171(33.987,-4.5) 172(33.987,-4) 173(33.987,-3.5) 174(33.987,-3) 175(33.987,-2.5) 176(33.987,-2) 177(33.987,-1.5) 178(33.987,-1) 179(33.987,-0.5) 180(33.987,0)
  rect 0.254x2.413 smd: 61(2.244,-31.744) 62(2.744,-31.744) 63(3.244,-31.744) 64(3.744,-31.744) 65(4.244,-31.744) 66(4.744,-31.744) 67(5.244,-31.744) 68(5.744,-31.744) 69(6.244,-31.744) 70(6.744,-31.744) 71(7.244,-31.744) 72(7.744,-31.744) 73(8.243,-31.744) 74(8.743,-31.744) 75(9.243,-31.744) 76(9.743,-31.744) 77(10.243,-31.744) 78(10.743,-31.744) 79(11.243,-31.744) 80(11.743,-31.744) 81(12.243,-31.744) 82(12.743,-31.744) 83(13.243,-31.744) 84(13.743,-31.744) 85(14.243,-31.744) 86(14.743,-31.744) 87(15.243,-31.744) 88(15.743,-31.744) 89(16.244,-31.744) 90(16.744,-31.744) 91(17.244,-31.744) 92(17.744,-31.744) 93(18.244,-31.744) 94(18.744,-31.744) 95(19.244,-31.744) 96(19.744,-31.744) 97(20.244,-31.744) 98(20.744,-31.744) 99(21.244,-31.744) 100(21.744,-31.744) 101(22.244,-31.744) 102(22.744,-31.744) 103(23.244,-31.744) 104(23.744,-31.744) 105(24.244,-31.744) 106(24.744,-31.744) 107(25.244,-31.744) 108(25.744,-31.744) 109(26.244,-31.744) 110(26.744,-31.744) 111(27.244,-31.744) 112(27.744,-31.744) 113(28.244,-31.744) 114(28.744,-31.744) 115(29.244,-31.744) 116(29.744,-31.744) 117(30.244,-31.744) 118(30.744,-31.744) 119(31.244,-31.744) 120(31.744,-31.744) 181(31.744,2.244) 182(31.244,2.244) 183(30.744,2.244) 184(30.244,2.244) 185(29.744,2.244) 186(29.244,2.244) 187(28.744,2.244) 188(28.244,2.244) 189(27.744,2.244) 190(27.244,2.244) 191(26.744,2.244) 192(26.244,2.244) 193(25.744,2.244) 194(25.244,2.244) 195(24.744,2.244) 196(24.244,2.244) 197(23.744,2.244) 198(23.244,2.244) 199(22.744,2.244) 200(22.244,2.244) 201(21.744,2.244) 202(21.244,2.244) 203(20.744,2.244) 204(20.244,2.244) 205(19.744,2.244) 206(19.244,2.244) 207(18.744,2.244) 208(18.244,2.244) 209(17.744,2.244) 210(17.244,2.244) 211(16.744,2.244) 212(16.244,2.244) 213(15.743,2.244) 214(15.243,2.244) 215(14.743,2.244) 216(14.243,2.244) 217(13.743,2.244) 218(13.243,2.244) 219(12.743,2.244) 220(12.243,2.244) 221(11.743,2.244) 222(11.243,2.244) 223(10.743,2.244) 224(10.243,2.244) 225(9.743,2.244) 226(9.243,2.244) 227(8.743,2.244) 228(8.243,2.244) 229(7.744,2.244) 230(7.244,2.244) 231(6.744,2.244) 232(6.244,2.244) 233(5.744,2.244) 234(5.244,2.244) 235(4.744,2.244) 236(4.244,2.244) 237(3.744,2.244) 238(3.244,2.244) 239(2.744,2.244) 240(2.244,2.244)
QZ_KTH039C
  round 1.27 hole 0.61: 1(0,0) 4(7.62,0) 5(7.62,7.62) 8(0,7.62)
SAMTEC_SSW-103-01-G-D
  round 1.6 hole 0.9: 1(2.54,-1.27) 2(2.54,1.27) 3(0,-1.27) 4(0,1.27) 5(-2.54,-1.27) 6(-2.54,1.27)
SOD323_INV
  rect 0.9x0.5 smd: 1(1.3,0) 2(-1.3,0)
SOIC127P600X175-8N
  rect 1.6x0.6 smd: 1(-2.65,1.905) 2(-2.65,0.635) 3(-2.65,-0.635) 4(-2.65,-1.905) 5(2.65,-1.905) 6(2.65,-0.635) 7(2.65,0.635) 8(2.65,1.905)
SOP65P490X95-8N
  rect 1.45x0.45 smd: 1(-2.2,0.975) 2(-2.2,0.325) 3(-2.2,-0.325) 4(-2.2,-0.975) 5(2.2,-0.975) 6(2.2,-0.325) 7(2.2,0.325) 8(2.2,0.975)

## Nets
AVDD: C29_1.2(B<0>) C54_1.2(B<0>) J1.147(A<146>) J1.148(A<147>) J1.149(A<148>) J1.150(A<149>) J1_1.6(A<5>) R5_1.2(B<0>) R6_1.2(B<0>) R7_1.2(B<0>) R8_1.2(B<0>) R9_1.2(B<0>) R10_1.2(B<0>) R11_1.2(B<0>) R12_1.2(B<0>) R13_1.2(B<0>) R14_1.2(B<0>) R15_1.2(B<0>) R16_1.2(B<0>) R17_1.2(B<0>) R20_1.2(B<0>) R22_1.2(B<0>) R25_1.2(B<0>) R27_1.2(B<0>) R28_1.2(B<0>) R30_1.2(B<0>) R32_1.2(B<0>) R34_1.2(B<0>) R36_1.2(B<0>) R42_1.2(B<0>) R46_1.1(A<0>) R47_1.1(A<0>) RG1_1.3(IN<1>) RG1_1.4(IN<2>)
DGND: J2.A31(A<30>) J2.B31(B<30>) J2.C31(C<30>) J3.A2(A<1>) J3.B2(B<1>) J3.C2(C<1>)
GND: IC1.8
GND_SIGNAL: C1_1.2(B<0>) C2_1.1(A<0>) C3_1.1(A<0>) C4_1.1(A<0>) C5_1.1(A<0>) C6_1.1(A<0>) C7_1.1(A<0>) C8_1.1(A<0>) C9_1.1(A<0>) C10_1.1(A<0>) C11_1.1(A<0>) C12_1.1(A<0>) C13_1.1(A<0>) C14_1.1(A<0>) C15_1.1(A<0>) C16_1.1(A<0>) C17_1.1(A<0>) C18_1.1(A<0>) C19_1.1(A<0>) C20_1.1(A<0>) C21_1.1(A<0>) C22_1.1(A<0>) C23_1.1(A<0>) C24_1.1(A<0>) C25_1.1(A<0>) C26_1.1(A<0>) C27_1.1(A<0>) C28_1.1(A<0>) C30_1.1(A<0>) C31_1.1(A<0>) C32_1.1(A<0>) C33_1.1(A<0>) C34_1.1(A<0>) C35_1.1(A<0>) C36_1.1(A<0>) C37_1.1(A<0>) C38_1.1(A<0>) C39_1.1(A<0>) C40_1.1(A<0>) C41_1.1(A<0>) C42_1.1(A<0>) C43_1.1(A<0>) C44_1.1(A<0>) C45_1.1(A<0>) C46_1.1(A<0>) C47_1.1(A<0>) C48_1.2(B<0>) C50_1.1(A<0>) C51_1.1(A<0>) C52_1.1(A<0>) C53_1.1(A<0>) C54_1.1(A<0>) D1_1.1(K<0>) J1.1(A<0>) J1.4(A<3>) J1.5(A<4>) J1.8(A<7>) J1.9(A<8>) J1.12(A<11>) J1.13(A<12>) J1.16(A<15>) J1.17(A<16>) J1.20(A<19>) J1.21(A<20>) J1.24(A<23>) J1.25(A<24>) J1.28(A<27>) J1.29(A<28>) J1.32(A<31>) J1.33(A<32>) J1.36(A<35>) J1.37(A<36>) J1.40(A<39>) J1.41(A<40>) J1.44(A<43>) J1.45(A<44>) J1.48(A<47>) J1.49(A<48>) J1.52(A<51>) J1.53(A<52>) J1.56(A<55>) J1.57(A<56>) J1.60(A<59>) J1.61(A<60>) J1.64(A<63>) J1.65(A<64>) J1.68(A<67>) J1.69(A<68>) J1.72(A<71>) J1.73(A<72>) J1.76(A<75>) J1.77(A<76>) J1.80(A<79>) J1.81(A<80>) J1.84(A<83>) J1.85(A<84>) J1.88(A<87>) J1.89(A<88>) J1.92(A<91>) J1.93(A<92>) J1.96(A<95>) J1.97(A<96>) J1.100(A<99>) J1.101(A<100>) J1.104(A<103>) J1.105(A<104>) J1.108(A<107>) J1.109(A<108>) J1.112(A<111>) J1.113(A<112>) J1.116(A<115>) J1.117(A<116>) J1.120(A<119>) J1.121(A<120>) J1.124(A<123>) J1.125(A<124>) J1.128(A<127>) J1.129(A<128>) J1.132(A<131>) J1.133(A<132>) J1.136(A<135>) J1.137(A<136>) J1.140(A<139>) J1.141(A<140>) J1.144(A<143>) J1.145(A<144>) J1.146(A<145>) J1_1.2(A<1>) J1_1.4(A<3>) J1_1.5(A<4>) J2.A3(A<2>) J2.A6(A<5>) J2.A9(A<8>) J2.A12(A<11>) J2.A15(A<14>) J2.A18(A<17>) J2.A21(A<20>) J2.A24(A<23>) J2.A27(A<26>) J2.A30(A<29>) J2.B1(B<0>) J2.B2(B<1>) J2.B3(B<2>) J2.B4(B<3>) J2.B5(B<4>) J2.B6(B<5>) J2.B7(B<6>) J2.B8(B<7>) J2.B9(B<8>) J2.B10(B<9>) J2.B11(B<10>) J2.B12(B<11>) J2.B13(B<12>) J2.B14(B<13>) J2.B15(B<14>) J2.B16(B<15>) J2.B17(B<16>) J2.B18(B<17>) J2.B19(B<18>) J2.B20(B<19>) J2.B21(B<20>) J2.B22(B<21>) J2.B23(B<22>) J2.B24(B<23>) J2.B25(B<24>) J2.B26(B<25>) J2.B29(B<28>) J2.B30(B<29>) J2.C3(C<2>) J2.C6(C<5>) J2.C9(C<8>) J2.C12(C<11>) J2.C15(C<14>) J2.C18(C<17>) J2.C21(C<20>) J2.C24(C<23>) J2.C27(C<26>) J2.C30(C<29>) J3.B3(B<2>) J3.B4(B<3>) J3.B7(B<6>) J3.B8(B<7>) J3.B9(B<8>) J3.B10(B<9>) J3.B11(B<10>) J3.B12(B<11>) J3.B13(B<12>) J3.B14(B<13>) J3.B15(B<14>) J3.B16(B<15>) J3.B17(B<16>) J3.B18(B<17>) J3.B19(B<18>) J3.B20(B<19>) J3.B21(B<20>) J3.B22(B<21>) J3.B23(B<22>) J3.B24(B<23>) J3.B25(B<24>) J3.B26(B<25>) J3.B27(B<26>) J3.B28(B<27>) J3.B29(B<28>) J3.B30(B<29>) J3.B31(B<30>) J3.B32(B<31>) J3.C3(C<2>) J3.C6(C<5>) J3.C9(C<8>) J3.C12(C<11>) J3.C15(C<14>) J3.C18(C<17>) J3.C21(C<20>) J3.C24(C<23>) J3.C27(C<26>) J3.C30(C<29>) J3_1.1(A<0>) J4_1.3(A<2>) LK30_1.1(A<0>) LK55_1.1(A<0>) R21_1.1(A<0>) R23_1.1(A<0>) R26_1.1(A<0>) R29_1.1(A<0>) R31_1.1(A<0>) R33_1.1(A<0>) R35_1.1(A<0>) R37_1.1(A<0>) RG1_1.1(GND) RG1_1.2(EN*) U1_1.30(GND_PA2) U1_1.63(GND_PA) U1_1.65(VSSA) U1_1.73(GND_NMOS) U1_1.77(GND_W) U1_1.85(GND_DAC) U1_1.92(E_FSU) U1_1.98(GND_WILK) U1_1.102(VSSA2) U1_1.103(VSSM) U1_1.109(GND_DISCRI) U1_1.111(VSSD) U1_1.112(GNDD) U1_1.150(VSSD2) U1_1.183(GNDD2) U1_1.189(VSSD3) U1_1.195(GND_DISCRI2) U1_1.197(VSSM2) U1_1.198(VSS) U1_1.202(GND_FSU) U1_1.206(GND_FSB1) U1_1.211(GND_FSB0) U1_1.217(GND_CAPA) U1_1.219(GND_SS) U1_1.227(GND_OTAG) U1_1.231(GND_NMOS2) U1_1.235(VSSI) U1_1.237(GND_PA3)
P12V: J2.A32(A<31>) J2.B32(B<31>) J2.C32(C<31>) J3.A1(A<0>) J3.B1(B<0>) J3.C1(C<0>)
VDD: IC1.1
VDD_BUF1_1: C7_1.2(B<0>) LK7_1.1(A<0>) R9_1.1(A<0>) U1_1.223(VDD_BUF1)
VDD_DAC_1: C3_1.2(B<0>) LK3_1.1(A<0>) R5_1.1(A<0>) U1_1.87(VDD_DAC)
VDD_DISCRI_1: C14_1.2(B<0>) LK14_1.1(A<0>) R15_1.1(A<0>) U1_1.105(VDD_DISCRI)
VDD_DISCRIADC_1: C15_1.2(B<0>) C17_1.2(B<0>) LK15_1.1(A<0>) R16_1.1(A<0>) U1_1.107(VDD_DISCRIADC) U1_1.193(VDD_DISCRIADC2)
VDD_FSB_1: C12_1.2(B<0>) LK10_1.1(A<0>) R13_1.1(A<0>) U1_1.210(VDD_FSB)
VDD_FSU1_1: C13_1.2(B<0>) LK11_1.1(A<0>) R14_1.1(A<0>) U1_1.90(VDD_FSU1)
VDD_FSU2_1: C16_1.2(B<0>) LK13_1.1(A<0>) R17_1.1(A<0>) U1_1.204(VDD_FSU2)
VDD_OTAG_1: C5_1.2(B<0>) LK5_1.1(A<0>) R7_1.1(A<0>) U1_1.225(VDD_OTAG)
VDD_PA_1: C6_1.2(B<0>) C8_1.2(B<0>) LK6_1.1(A<0>) R8_1.1(A<0>) U1_1.67(VDD_PA) U1_1.233(VDD_PA2)
VDD_PAD_1: C4_1.2(B<0>) LK4_1.1(A<0>) R6_1.1(A<0>) U1_1.236(VDD_PAD)
VDD_SS_1: C10_1.2(B<0>) LK9_1.1(A<0>) R11_1.1(A<0>) U1_1.221(VDD_SS)
VDD_W_1: C9_1.2(B<0>) LK8_1.1(A<0>) R10_1.1(A<0>) U1_1.83(VDD_W)
VDD_WILK_1: C11_1.2(B<0>) LK12_1.1(A<0>) R12_1.1(A<0>) U1_1.100(VDD_WILK)
VDDD2_1: C2_1.2(B<0>) LK2_1.1(A<0>) R4_1.2(B<0>) U1_1.113(VDDD2)
VDDD_1: C1_1.1(A<0>) LK1_1.1(A<0>) R3_1.2(B<0>) U1_1.185(VDDD)
ADC_DAV_1: LK54_1.1(A<0>) R18_1.1(A<0>)
ANALOG_TO_MAROC<0>: J1.2(A<1>) U1_1.238(IN0)
ANALOG_TO_MAROC<1>: J1.3(A<2>) U1_1.239(IN1)
ANALOG_TO_MAROC<2>: J1.6(A<5>) U1_1.240(IN2)
ANALOG_TO_MAROC<3>: J1.7(A<6>) U1_1.1(IN3)
ANALOG_TO_MAROC<4>: J1.10(A<9>) U1_1.2(IN4)
ANALOG_TO_MAROC<5>: J1.11(A<10>) U1_1.3(IN5)
ANALOG_TO_MAROC<6>: J1.14(A<13>) U1_1.4(IN6)
ANALOG_TO_MAROC<7>: J1.15(A<14>) U1_1.5(IN7)
ANALOG_TO_MAROC<8>: J1.18(A<17>) U1_1.6(IN8)
ANALOG_TO_MAROC<9>: J1.19(A<18>) U1_1.7(IN9)
ANALOG_TO_MAROC<10>: J1.22(A<21>) U1_1.8(IN10)
ANALOG_TO_MAROC<11>: J1.23(A<22>) U1_1.9(IN11)
ANALOG_TO_MAROC<12>: J1.26(A<25>) U1_1.10(IN12)
ANALOG_TO_MAROC<13>: J1.27(A<26>) U1_1.11(IN13)
ANALOG_TO_MAROC<14>: J1.30(A<29>) U1_1.12(IN14)
ANALOG_TO_MAROC<15>: J1.31(A<30>) U1_1.13(IN15)
ANALOG_TO_MAROC<16>: J1.34(A<33>) U1_1.14(IN16)
ANALOG_TO_MAROC<17>: J1.35(A<34>) U1_1.15(IN17)
ANALOG_TO_MAROC<18>: J1.38(A<37>) U1_1.16(IN18)
ANALOG_TO_MAROC<19>: J1.39(A<38>) U1_1.17(IN19)
ANALOG_TO_MAROC<20>: J1.42(A<41>) U1_1.18(IN20)
ANALOG_TO_MAROC<21>: J1.43(A<42>) U1_1.19(IN21)
ANALOG_TO_MAROC<22>: J1.46(A<45>) U1_1.20(IN22)
ANALOG_TO_MAROC<23>: J1.47(A<46>) U1_1.21(IN23)
ANALOG_TO_MAROC<24>: J1.50(A<49>) U1_1.22(IN24)
ANALOG_TO_MAROC<25>: J1.51(A<50>) U1_1.23(IN25)
ANALOG_TO_MAROC<26>: J1.54(A<53>) U1_1.24(IN26)
ANALOG_TO_MAROC<27>: J1.55(A<54>) U1_1.25(IN27)
ANALOG_TO_MAROC<28>: J1.58(A<57>) U1_1.26(IN28)
ANALOG_TO_MAROC<29>: J1.59(A<58>) U1_1.27(IN29)
ANALOG_TO_MAROC<30>: J1.62(A<61>) U1_1.28(IN30)
ANALOG_TO_MAROC<31>: J1.63(A<62>) U1_1.29(IN31)
ANALOG_TO_MAROC<32>: J1.66(A<65>) U1_1.31(IN32)
ANALOG_TO_MAROC<33>: J1.67(A<66>) U1_1.32(IN33)
ANALOG_TO_MAROC<34>: J1.70(A<69>) U1_1.33(IN34)
ANALOG_TO_MAROC<35>: J1.71(A<70>) U1_1.34(IN35)
ANALOG_TO_MAROC<36>: J1.74(A<73>) U1_1.35(IN36)
ANALOG_TO_MAROC<37>: J1.75(A<74>) U1_1.36(IN37)
ANALOG_TO_MAROC<38>: J1.78(A<77>) U1_1.37(IN38)
ANALOG_TO_MAROC<39>: J1.79(A<78>) U1_1.38(IN39)
ANALOG_TO_MAROC<40>: J1.82(A<81>) U1_1.39(IN40)
ANALOG_TO_MAROC<41>: J1.83(A<82>) U1_1.40(IN41)
ANALOG_TO_MAROC<42>: J1.86(A<85>) U1_1.41(IN42)
ANALOG_TO_MAROC<43>: J1.87(A<86>) U1_1.42(IN43)
ANALOG_TO_MAROC<44>: J1.90(A<89>) U1_1.43(IN44)
ANALOG_TO_MAROC<45>: J1.91(A<90>) U1_1.44(IN45)
ANALOG_TO_MAROC<46>: J1.94(A<93>) U1_1.45(IN46)
ANALOG_TO_MAROC<47>: J1.95(A<94>) U1_1.46(IN47)
ANALOG_TO_MAROC<48>: J1.98(A<97>) U1_1.47(IN48)
ANALOG_TO_MAROC<49>: J1.99(A<98>) U1_1.48(IN49)
ANALOG_TO_MAROC<50>: J1.102(A<101>) U1_1.49(IN50)
ANALOG_TO_MAROC<51>: J1.103(A<102>) U1_1.50(IN51)
ANALOG_TO_MAROC<52>: J1.106(A<105>) U1_1.51(IN52)
ANALOG_TO_MAROC<53>: J1.107(A<106>) U1_1.52(IN53)
ANALOG_TO_MAROC<54>: J1.110(A<109>) U1_1.53(IN54)
ANALOG_TO_MAROC<55>: J1.111(A<110>) U1_1.54(IN55)
ANALOG_TO_MAROC<56>: J1.114(A<113>) U1_1.55(IN56)
ANALOG_TO_MAROC<57>: J1.115(A<114>) U1_1.56(IN57)
ANALOG_TO_MAROC<58>: J1.118(A<117>) U1_1.57(IN58)
ANALOG_TO_MAROC<59>: J1.119(A<118>) U1_1.58(IN59)
ANALOG_TO_MAROC<60>: J1.122(A<121>) U1_1.59(IN60)
ANALOG_TO_MAROC<61>: J1.123(A<122>) U1_1.60(IN61)
ANALOG_TO_MAROC<62>: J1.126(A<125>) U1_1.61(IN62)
ANALOG_TO_MAROC<63>: J1.127(A<126>) U1_1.62(IN63)
CK_40M_1: J3_1.2(A<1>) R24_1.1(A<0>) U1_1.188(CK_40M)
CK_R_1: LK64_1.1(A<0>) U1_1.78(CK_R)
CK_SC_1: LK57_1.1(A<0>) U1_1.68(CK_SC)
CKB_40M_1: J3_1.3(A<2>) R24_1.2(B<0>) U1_1.186(CKB_40M)
CTEST_1: J4_1.1(A<0>)
D_R_1: LK67_1.1(A<0>) U1_1.82(D_R)
D_SC_1: LK60_1.1(A<0>) U1_1.64(D_SC)
DBOARD_MISO: J1.131(A<130>)
DBOARD_MISO*: J1.135(A<134>)
DBOARD_MOSI: J1.138(A<137>)
DBOARD_MOSI*: J1.142(A<141>)
DBOARD_SCLK: J1.130(A<129>)
DBOARD_SCLK*: J1.134(A<133>)
DBOARD_SSN: J1.139(A<138>)
DBOARD_SSN*: J1.143(A<142>)
EN_OTAG_1: LK58_1.1(A<0>) U1_1.213(EN_OTAG)
G_DIODE_1: C27_1.2(B<0>) LK25_1.1(A<0>) U1_1.91(G_DIODE)
HOLD1_1: LK62_1.1(A<0>) U1_1.79(HOLD1)
HOLD2_1: LK65_1.1(A<0>) U1_1.81(HOLD2)
IB_INTEG_1: C41_1.2(B<0>) LK44_1.1(A<0>) U1_1.101(IB_INTEG)
IB_SUM_1: C35_1.2(B<0>) LK38_1.1(A<0>) U1_1.212(IB_SUM)
IB_W_1: C31_1.2(B<0>) LK34_1.1(A<0>) U1_1.209(IB_W)
IBI_BUF_1: C28_1.2(B<0>) LK31_1.1(A<0>) U1_1.74(IBI_BUF)
IBI_SS_1: C32_1.2(B<0>) LK35_1.1(A<0>) U1_1.70(IBI_SS)
IBO_DAC_1: C40_1.2(B<0>) LK43_1.1(A<0>) U1_1.84(IBO_DAC)
IBO_SS_1: C36_1.2(B<0>) LK39_1.1(A<0>) U1_1.72(IBO_SS)
IREF_DAC_1: C24_1.2(B<0>) LK22_1.1(A<0>) R25_1.1(A<0>) R26_1.2(B<0>) U1_1.86(IREF_DAC)
LVDS_CLK_IN_N: J2.B28(B<27>) J3.B5(B<4>)
LVDS_CLK_IN_P: J2.B27(B<26>) J3.B6(B<5>)
LVDS_CLK_OUT_N: J2.A29(A<28>) J3.A4(A<3>)
LVDS_CLK_OUT_P: J2.A28(A<27>) J3.A5(A<4>)
LVDS_DIN_CLK_N: J2.A26(A<25>) J2.C2(C<1>) J3.A7(A<6>) J3.C31(C<30>)
LVDS_DIN_CLK_P: J2.A25(A<24>) J2.C1(C<0>) J3.A8(A<7>) J3.C32(C<31>)
LVDS_DIN_N<0>: J2.A2(A<1>) J3.A31(A<30>)
LVDS_DIN_N<1>: J2.C5(C<4>) J3.C28(C<27>)
LVDS_DIN_N<2>: J2.A5(A<4>) J3.A28(A<27>)
LVDS_DIN_N<3>: J2.C8(C<7>) J3.C25(C<24>)
LVDS_DIN_N<4>: J2.A8(A<7>) J3.A25(A<24>)
LVDS_DIN_N<5>: J2.C11(C<10>) J3.C22(C<21>)
LVDS_DIN_N<6>: J2.A11(A<10>) J3.A22(A<21>)
LVDS_DIN_N<7>: J2.C14(C<13>) J3.C19(C<18>)
LVDS_DIN_N<8>: J2.A14(A<13>) J3.A19(A<18>)
LVDS_DIN_N<9>: J2.C17(C<16>) J3.C16(C<15>)
LVDS_DIN_N<10>: J2.A17(A<16>) J3.A16(A<15>)
LVDS_DIN_N<11>: J2.C20(C<19>) J3.C13(C<12>)
LVDS_DIN_N<12>: J2.A20(A<19>) J3.A13(A<12>)
LVDS_DIN_N<13>: J2.C23(C<22>) J3.C10(C<9>)
LVDS_DIN_N<14>: J2.A23(A<22>) J3.A10(A<9>)
LVDS_DIN_N<15>: J2.C26(C<25>) J3.C7(C<6>)
LVDS_DIN_P<0>: J2.A1(A<0>) J3.A32(A<31>)
LVDS_DIN_P<1>: J2.C4(C<3>) J3.C29(C<28>)
LVDS_DIN_P<2>: J2.A4(A<3>) J3.A29(A<28>)
LVDS_DIN_P<3>: J2.C7(C<6>) J3.C26(C<25>)
LVDS_DIN_P<4>: J2.A7(A<6>) J3.A26(A<25>)
LVDS_DIN_P<5>: J2.C10(C<9>) J3.C23(C<22>)
LVDS_DIN_P<6>: J2.A10(A<9>) J3.A23(A<22>)
LVDS_DIN_P<7>: J2.C13(C<12>) J3.C20(C<19>)
LVDS_DIN_P<8>: J2.A13(A<12>) J3.A20(A<19>)
LVDS_DIN_P<9>: J2.C16(C<15>) J3.C17(C<16>)
LVDS_DIN_P<10>: J2.A16(A<15>) J3.A17(A<16>)
LVDS_DIN_P<11>: J2.C19(C<18>) J3.C14(C<13>)
LVDS_DIN_P<12>: J2.A19(A<18>) J3.A14(A<13>)
LVDS_DIN_P<13>: J2.C22(C<21>) J3.C11(C<10>)
LVDS_DIN_P<14>: J2.A22(A<21>) J3.A11(A<10>)
LVDS_DIN_P<15>: J2.C25(C<24>) J3.C8(C<7>)
LVDS_GLOBALTRIG_N: J2.C29(C<28>) J3.C4(C<3>)
LVDS_GLOBALTRIG_P: J2.C28(C<27>) J3.C5(C<4>)
OR<0>_1: LK51_1.1(A<0>) R1_1.2(B<0>)
OR<1>_1: LK52_1.1(A<0>) R2_1.2(B<0>)
OUT_ADC_1: LK56_1.1(A<0>) R19_1.1(A<0>)
OUT_FS_1: J1_1.3(A<2>) U1_1.201(OUT_FS)
OUT_Q_1: J1_1.1(A<0>) U1_1.215(OUT_Q)
P1: J1.151 J1.152 J1.153 J1.154
P2: J1.155 J1.156 J1.157 J1.158
P3: J1.159 J1.160 J1.161 J1.162
PWR_ON_1: R27_1.1(A<0>) U1_1.110(PWR_ON)
QBUF_R_1: LK61_1.1(A<0>) U1_1.76(QBUF_R)
QBUF_SC_1: LK63_1.1(A<0>) U1_1.199(QBUF_SC)
RAMP_1: LK27_1.1(A<0>) U1_1.97(RAMP)
RSTB_R_1: LK53_1.1(A<0>) U1_1.80(RSTB_R)
RSTN_ADC_1: LK68_1.1(A<0>) U1_1.184(RSTN_ADC)
RSTN_SC_1: LK66_1.1(A<0>) U1_1.66(RSTN_SC)
START_ADCB_1: LK59_1.1(A<0>) U1_1.116(START_ADCB)
SUM<1>_1: U1_1.228(SUM1)
SUM<2>_1: U1_1.226(SUM2)
SUM<3>_1: U1_1.224(SUM3)
SUM<4>_1: U1_1.222(SUM4)
SUM<5>_1: U1_1.220(SUM5)
SUM<6>_1: U1_1.218(SUM6)
SUM<7>_1: U1_1.216(SUM7)
SUM<8>_1: U1_1.214(SUM8)
TRIG<0>_1: LK26_1.1(A<0>) U1_1.182(OUT0)
TRIG<1>_1: U1_1.181(OUT1)
TRIG<2>_1: U1_1.180(OUT2)
TRIG<3>_1: U1_1.179(OUT3)
TRIG<4>_1: U1_1.178(OUT4)
TRIG<5>_1: U1_1.177(OUT5)
TRIG<6>_1: U1_1.176(OUT6)
TRIG<7>_1: U1_1.175(OUT7)
TRIG<8>_1: U1_1.174(OUT8)
TRIG<9>_1: U1_1.173(OUT9)
TRIG<10>_1: U1_1.172(OUT10)
TRIG<11>_1: U1_1.171(OUT11)
TRIG<12>_1: U1_1.170(OUT12)
TRIG<13>_1: U1_1.169(OUT13)
TRIG<14>_1: U1_1.168(OUT14)
TRIG<15>_1: U1_1.167(OUT15)
TRIG<16>_1: U1_1.166(OUT16)
TRIG<17>_1: U1_1.165(OUT17)
TRIG<18>_1: U1_1.164(OUT18)
TRIG<19>_1: U1_1.163(OUT19)
TRIG<20>_1: U1_1.162(OUT20)
TRIG<21>_1: U1_1.161(OUT21)
TRIG<22>_1: U1_1.160(OUT22)
TRIG<23>_1: U1_1.159(OUT23)
TRIG<24>_1: U1_1.158(OUT24)
TRIG<25>_1: U1_1.157(OUT25)
TRIG<26>_1: U1_1.156(OUT26)
TRIG<27>_1: U1_1.155(OUT27)
TRIG<28>_1: U1_1.154(OUT28)
TRIG<29>_1: U1_1.153(OUT29)
TRIG<30>_1: U1_1.152(OUT30)
TRIG<31>_1: U1_1.151(OUT31)
TRIG<32>_1: U1_1.149(OUT32)
TRIG<33>_1: U1_1.148(OUT33)
TRIG<34>_1: U1_1.147(OUT34)
TRIG<35>_1: U1_1.146(OUT35)
TRIG<36>_1: U1_1.145(OUT36)
TRIG<37>_1: U1_1.144(OUT37)
TRIG<38>_1: U1_1.143(OUT38)
TRIG<39>_1: U1_1.142(OUT39)
TRIG<40>_1: U1_1.141(OUT40)
TRIG<41>_1: U1_1.140(OUT41)
TRIG<42>_1: U1_1.139(OUT42)
TRIG<43>_1: U1_1.138(OUT43)
TRIG<44>_1: U1_1.137(OUT44)
TRIG<45>_1: U1_1.136(OUT45)
TRIG<46>_1: U1_1.135(OUT46)
TRIG<47>_1: U1_1.134(OUT47)
TRIG<48>_1: U1_1.133(OUT48)
TRIG<49>_1: U1_1.132(OUT49)
TRIG<50>_1: U1_1.131(OUT50)
TRIG<51>_1: U1_1.130(OUT51)
TRIG<52>_1: U1_1.129(OUT52)
TRIG<53>_1: U1_1.128(OUT53)
TRIG<54>_1: U1_1.127(OUT54)
TRIG<55>_1: U1_1.126(OUT55)
TRIG<56>_1: U1_1.125(OUT56)
TRIG<57>_1: U1_1.124(OUT57)
TRIG<58>_1: U1_1.123(OUT58)
TRIG<59>_1: U1_1.122(OUT59)
TRIG<60>_1: U1_1.121(OUT60)
TRIG<61>_1: U1_1.120(OUT61)
TRIG<62>_1: U1_1.119(OUT62)
TRIG<63>_1: U1_1.118(OUT63)
UNNAMED_1_MAROC3_I1_OR0_1: R1_1.1(A<0>) U1_1.191(OR_0)
UNNAMED_1_MAROC3_I1_OR1_1: R2_1.1(A<0>) U1_1.192(OR_1)
UNNAMED_2_CAPCERSMDCL2_I82_B_1: C53_1.2(B<0>) R4_1.1(A<0>) R47_1.2(B<0>)
UNNAMED_2_CAPCERSMDCL2_I84_B_1: C52_1.2(B<0>) R3_1.1(A<0>) R46_1.2(B<0>)
UNNAMED_3_CON3P_I231_A_1: J4_1.2(A<1>) U1_1.234(CTEST)
UNNAMED_3_CONABC96_I74_A: J3.A3(A<2>) J3.A6(A<5>) J3.A9(A<8>) J3.A12(A<11>) J3.A15(A<14>) J3.A18(A<17>) J3.A21(A<20>) J3.A24(A<23>) J3.A27(A<26>) J3.A30(A<29>)
UNNAMED_3_MAROC3_I1_ADCDAV_1: R18_1.2(B<0>) U1_1.115(ADC_DAV)
UNNAMED_3_MAROC3_I1_OUTADC_1: R19_1.2(B<0>) U1_1.114(OUT_ADC)
V_BG_1: C25_1.2(B<0>) LK23_1.1(A<0>) U1_1.200(V_BG)
VB_OTAFSU_1: C37_1.2(B<0>) LK40_1.1(A<0>) U1_1.203(VB_OTAFSU)
VBI_DISCRI_1: C45_1.2(B<0>) LK48_1.1(A<0>) U1_1.104(VBI_DISCRI)
VBI_DISCRIADC_1: C44_1.2(B<0>) LK47_1.1(A<0>) R36_1.1(A<0>) R37_1.2(B<0>) U1_1.117(VBI_DISCRIADC)
VBI_FSB_1: C42_1.2(B<0>) LK45_1.1(A<0>) U1_1.207(VBI_FSB)
VBI_PA_1: C38_1.2(B<0>) LK41_1.1(A<0>) R34_1.1(A<0>) R35_1.2(B<0>) U1_1.230(VBI_PA)
VBI_TZ_1: C29_1.1(A<0>) LK32_1.1(A<0>) R28_1.1(A<0>) R29_1.2(B<0>) U1_1.89(VBI_TZ)
VBM_DISCRI_1: C30_1.2(B<0>) LK33_1.1(A<0>) U1_1.106(VBM_DISCRI)
VBO_DISCRI_1: C34_1.2(B<0>) LK37_1.1(A<0>) R32_1.1(A<0>) R33_1.2(B<0>) U1_1.108(VBO_DISCRI)
VBO_FSB_1: C46_1.2(B<0>) LK49_1.1(A<0>) U1_1.205(VBO_FSB)
VBO_TZ_1: C33_1.2(B<0>) LK36_1.1(A<0>) R30_1.1(A<0>) R31_1.2(B<0>) U1_1.93(VBO_TZ)
VCASC_FSU_1: C47_1.2(B<0>) LK50_1.1(A<0>) U1_1.94(VCASC_FSU)
VCASC_NMOS_1: C43_1.2(B<0>) LK46_1.1(A<0>) U1_1.229(VCASC_NMOS)
VCASC_PMOS_1: C39_1.2(B<0>) LK42_1.1(A<0>) U1_1.71(VCASC_PMOS)
VGAIN_PA_1: C18_1.2(B<0>) LK16_1.1(A<0>) U1_1.69(VGAIN_PA)
VH_1: C48_1.1(A<0>) C51_1.2(B<0>) RG1_1.5(OUT<1>) RG1_1.6(OUT<2>) U1_1.190(VH)
VL_1: C50_1.2(B<0>) D1_1.2(A<0>) R42_1.1(A<0>) U1_1.187(VL)
VREF_DAC_1: C22_1.2(B<0>) LK20_1.1(A<0>) U1_1.88(VREF_DAC)
VREF_FSB_1: C23_1.2(B<0>) LK21_1.1(A<0>) U1_1.208(VREF_FSB)
VREF_FSU_1: C26_1.2(B<0>) LK24_1.1(A<0>) U1_1.96(VREF_FSU)
VREF_RAMP_1: C19_1.2(B<0>) LK17_1.1(A<0>) R20_1.1(A<0>) R21_1.2(B<0>) U1_1.99(VREF_RAMP)
VREF_SS_1: C20_1.2(B<0>) LK18_1.1(A<0>) U1_1.75(VREF_SS)
VSLOPE_1: C21_1.2(B<0>) LK19_1.1(A<0>) R22_1.1(A<0>) R23_1.2(B<0>) U1_1.95(VSLOPE)
VTH0_1: LK28_1.1(A<0>) U1_1.196(VTH0)
VTH1_1: LK29_1.1(A<0>) U1_1.194(VTH1)

Pads without a net: IC1 2 3 4 5 6 7; J2 1 2; J3 1 2; QZ1 1 4 5 8; RG1_1 7 8; U1_1 232

## Via types
v1: diameter 0.914, hole 0.406, TOP to BOTTOM, 152 vias

## Routing (per net, layer and track width the routed paths; a pad name or vN(x,y) marks a point on that pad's centre or on a via; arc(x,y) is an arc through that point)
AVDD: length 41
  BOTTOM w0.18: R47_1.1 v1(30.01,98.14) ; v1(63.14,101.33) 62,101.33 C54_1.2 61.82,101.15 61.82,100.17 v1(61.62,99.97) ; v1(63.14,101.33) 63.14,101.63 ; v1(63.14,101.33) 63.14,101.05 63.67,100.52 R42_1.2 ; R17_1.2 64.46,109.55 v1(64.31,109.55) ; 44.2,110.66 44.2,110.68 43.86,111.02 43.86,111.02 43.3,111.58 R28_1.2 C29_1.2 ; 44.2,110.66 45.54,110.66 45.54,110.66 v1(46.22,110.66) R14_1.2 ; 44.2,110.66 R22_1.2 ; v1(45.02,117.25) 44.21,117.25 R10_1.2 ; v1(32.75,107.17) 33.76,107.17 R12_1.2 ; R11_1.2 v1(65.34,116.9) 65.29,116.95 R9_1.2 ; R13_1.2 v1(64.16,111.71) ; v1(30.81,104.27) 31.48,104.27 31.92,104.71 R15_1.2 ; v1(32.8,111.36) 32.94,111.21 R30_1.2 ; R36_1.2 v1(43.81,97.73) ; R46_1.1 v1(73.23,95.87) ; R8_1.2 v1(43.08,123.71) ; R5_1.2 v1(45.14,113.92) ; v1(29.15,102.71) R16_1.2 ; R34_1.2 v1(63.8,122.6) ; R27_1.2 v1(46.04,101.4) ; R6_1.2 v1(65.24,124.77) ; R7_1.2 v1(64.35,119.21)
  BOTTOM w0.3: RG1_1.4 v1(56.06,108.35) ; RG1_1.3 v1(54.55,105.99)
GND_SIGNAL: length 151
  TOP w0.18: v1(69.77,107.55) 69.96,107.75 U1_1.202 ; U1_1.30 v1(55.25,127.15) ; v1(74.45,97.8) 74,98.25 U1_1.183 ; 38.01,106.02 U1_1.102 ; 38.01,106.02 U1_1.103 ; 38.01,106.02 39.88,106.02 v1(40.29,105.6) ; v1(32.67,103.5) 33.33,102.84 36.21,102.84 36.3,102.75 U1_1.109 ; U1_1.92 35.01,111.25 v1(32.75,113.51) ; v1(69.7,115.34) 69.79,115.25 U1_1.217 ; v1(40.3,120.75) 39.63,120.75 39.63,120.75 U1_1.73 ; U1_1.189 69.94,101.25 69.94,101.25 v1(69.94,101.24) ; v1(40.48,116.21) 40,115.73 40,115.5 39.25,114.75 U1_1.85 ; U1_1.211 v1(69.79,112.25) ; v1(40.2,118.52) 40.19,118.52 39.96,118.75 U1_1.77 ; v1(32.79,109.93) 34.47,108.25 U1_1.98 ; U1_1.235 70.35,124.25 70.09,123.99 68.88,123.99 v1(68.65,123.76) ; U1_1.231 68.81,122.25 68.5,122.57 v1(67.82,122.57) ; v1(73.81,116.25) 73.42,116.25 73.42,116.25 U1_1.219 ; U1_1.237 70.48,125.25 v1(69.7,126.03) ; U1_1.65 v1(40.32,124.75) ; v1(32.55,101.38) 35.55,101.38 35.59,101.34 36.21,101.34 36.63,101.76 37.95,101.76 38.01,101.7 ; U1_1.206 v1(69.25,109.75) ; U1_1.227 v1(73.82,120.25) ; U1_1.63 v1(39.8,125.75) ; U1_1.198 v1(69.58,105.75) 70.08,105.25 U1_1.197 ; v1(69.58,104.68) 69.58,104.68 70.01,104.25 U1_1.195 ; U1_1.111 38.01,101.7 ; 38.01,101.7 U1_1.112 ; U1_1.150 v1(54.75,96.8)
  BOTTOM w0.18: C9_1.1 44.21,116.06 v1(45.03,116.06) ; C50_1.1 v1(67.6,102.21) ; v1(46.15,114.51) 45.61,114.51 45.45,114.67 44.83,114.67 44.68,114.51 C3_1.1 ; C11_1.1 C26_1.1 33.8,109.89 ; 68.14,104.11 C51_1.1 ; v1(32.88,122.79) 32.96,122.71 C18_1.1 ; C4_1.1 v1(68.25,126.75) ; C45_1.1 v1(43.11,105.29) ; v1(32.75,113.51) 33.05,113.21 C13_1.1 R31_1.1 ; D1_1.1 63.09,98.77 62.48,98.77 ; v1(61.98,98.77) 62.48,98.77 ; 62.48,98.77 62.49,98.79 62.75,98.79 ; C17_1.1 33,101.71 32.67,101.38 v1(32.55,101.38) ; C53_1.1 v1(28.6,100.4) ; v1(43.11,110.71) C33_1.1 ; C33_1.1 C21_1.1 ; C33_1.1 C27_1.1 ; C16_1.1 67.34,109.85 67.32,109.88 C23_1.1 v1(66.22,110.38) ; C24_1.1 C40_1.1 v1(32.75,117.21) ; v1(32.75,115.21) R26_1.1 C22_1.1 ; C20_1.1 33.07,119.71 v1(32.9,119.55) ; C31_1.1 76.7,112.33 76.69,112.34 v1(76.69,113.5) ; R21_1.1 v1(47.13,107.71) ; C54_1.1 v1(59.39,101.25) ; C6_1.1 v1(32.92,124.71) ; 33.8,109.89 C47_1.1 ; 33.8,109.89 33.75,109.93 v1(32.79,109.93) ; C36_1.1 v1(43.63,121.23) ; C30_1.1 42.86,104.27 42.87,104.27 v1(43.54,104.27) ; C10_1.1 v1(67.35,115.16) ; C12_1.1 C35_1.1 v1(67.3,113.59) ; v1(32.67,103.5) 32.88,103.71 C15_1.1 ; C8_1.1 v1(31.77,123.71) ; C42_1.1 77,110.6 77.36,110.96 v1(77.61,110.96) ; C38_1.1 v1(77.51,121.74) ; C34_1.1 v1(46.06,102.65) ; R33_1.1 v1(43.16,102.02) ; 67.3,118.56 67.3,118.7 C5_1.1 ; 67.3,118.56 C7_1.1 ; 67.3,118.56 67.3,118.56 68.91,118.56 68.91,118.56 69.1,118.76 v1(69.78,118.76) ; v1(77.61,109.42) C46_1.1 ; C14_1.1 v1(32.79,105.71) ; C37_1.1 v1(77.57,108.21) ; R23_1.1 v1(47.16,109.71) ; v1(67.3,104.74) 67.52,104.74 ; C1_1.2 v1(67.22,99.22) ; C28_1.1 v1(43.08,120.21) ; C43_1.1 v1(66.27,121.21) ; v1(43.13,106.71) C41_1.1 C19_1.1 ; C25_1.1 v1(77.62,106.71) ; R29_1.1 v1(47.05,112.71) ; R35_1.1 v1(62.66,120.71) ; C32_1.1 v1(43.08,122.26) ; v1(32.84,121.49) 32.98,121.34 C39_1.1 ; C52_1.1 v1(71.78,95.38) ; C44_1.1 v1(43.21,98.74) ; C2_1.1 33.79,98.85 33.8,98.84 R37_1.1 v1(32.83,98.16)
  BOTTOM w0.3: v1(63.11,108.03) 64.28,106.85 C48_1.2 ; RG1_1.1 v1(54.62,103.45) ; RG1_1.2 v1(53.45,104.72) ; 67.52,104.74 68.14,104.11
VDD_BUF1_1: length 24.2
  TOP w0.18: U1_1.223 73.54,118.25 73.55,118.26 v1(74.22,118.26) 78.19,118.26 80.91,115.53 LK7_1.1
  BOTTOM w0.18: R9_1.1 66.19,117.39 66.32,117.26 68.07,117.26 68.2,117.39 C7_1.2 69.39,117.91 69.49,118.01 70.58,118.01 70.82,118.26 v1(74.22,118.26)
VDD_DAC_1: length 30.1
  TOP w0.18: U1_1.87 39.31,113.75 v1(40.21,114.65)
  L3 w0.18: v1(40.21,114.65) 38.87,114.65 34.67,118.85 31.87,118.85 27.57,123.15 LK3_1.1
  BOTTOM w0.18: R5_1.1 40.85,114.37 40.84,114.37 40.56,114.65 v1(40.21,114.65) 40.35,114.51 C3_1.2
VDD_DISCRI_1: length 20.4
  TOP w0.18: v1(35.64,104.75) U1_1.105
  L3 w0.18: LK14_1.1 28.08,102.83 28.84,103.59 29.46,103.59 29.86,103.2 31.26,103.2 32.25,104.19 35.08,104.19 v1(35.64,104.75)
  BOTTOM w0.18: C14_1.2 R15_1.1 34.74,104.75 v1(35.64,104.75)
VDD_DISCRIADC_1: length 60.2
  TOP w0.18: U1_1.107 v1(40.37,103.75) ; v1(69.56,103.64) 69.95,103.25 U1_1.193
  L3 w0.18: v1(69.56,103.64) 68.6,103.64 67.86,102.9 67.31,102.9 66.86,102.45 52.36,102.45 51.23,103.58 42.67,103.58 42.5,103.75 v1(40.37,103.75) 33.91,97.3 28.89,97.3 28.43,97.75 LK15_1.1
  BOTTOM w0.18: C15_1.2 R16_1.1 ; R16_1.1 35.19,102.71 35.33,102.85 35.78,102.85 35.8,102.84 36.42,102.84 36.43,102.85 36.52,102.85 37.42,103.75 v1(40.37,103.75) ; R16_1.1 C17_1.2
VDD_FSB_1: length 25.7
  TOP w0.18: LK10_1.1 84.76,111.47 83.49,112.74 78.82,112.74 77.29,114.26 76.06,114.26 75.04,113.25 75.04,113.25 v1(74.56,112.77) 73.75,111.96 73.74,111.96 73.53,111.75 U1_1.210
  BOTTOM w0.18: v1(74.56,112.77) 73.29,111.5 69.48,111.5 69.27,111.71 C12_1.2 68.2,111.24 68.06,111.11 66.81,111.11 R13_1.1
VDD_FSU1_1: length 27.3
  TOP w0.18: v1(44.3,111.68) 43.25,111.68 42.44,112.5 39.68,112.5 39.43,112.25 U1_1.90 v1(36.2,112.25)
  L3 w0.18: LK11_1.1 30.19,112.99 30.37,112.82 33.86,112.82 34.43,112.25 v1(36.2,112.25)
  BOTTOM w0.18: v1(36.2,112.25) 35.67,112.25 35.16,112.76 35.15,112.76 C13_1.2 ; R14_1.1 v1(44.3,111.68)
VDD_FSU2_1: length 28.4
  TOP w0.18: 69.79,108.75 69.84,108.8 73.61,108.8 73.85,108.56 73.9,108.5 74.66,108.5 77.19,105.97 78.12,105.97 78.54,106.39 LK13_1.1 ; 69.79,108.75 U1_1.204 ; 69.79,108.75 v1(69.75,108.71)
  BOTTOM w0.18: R17_1.1 66.2,108.2 66.46,107.94 67.98,107.94 68.24,108.2 C16_1.2 68.76,108.72 68.76,108.71 v1(69.75,108.71)
VDD_OTAG_1: length 26.6
  TOP w0.18: v1(69.76,120.04) 70.55,119.25 U1_1.225 79.23,119.25 81.93,116.55 LK5_1.1
  BOTTOM w0.18: v1(69.76,120.04) 69.7,120.1 68.19,120.1 ; 68.19,120.1 66.57,120.1 66.2,119.73 R7_1.1 ; 68.19,120.1 68.2,120.09 C5_1.2
VDD_PA_1: length 58.3
  TOP w0.18: v1(39.8,123.76) 39.48,123.76 39.47,123.75 U1_1.67 ; v1(69.69,123.25) 70.36,123.25 70.37,123.25 U1_1.233 77.26,123.25 79.13,121.37 81.42,121.37 83.2,119.6 LK6_1.1
  L3 w0.18: v1(69.69,123.25) 68.32,121.87 66.6,121.87 66.56,121.91 65.98,121.91 65.94,121.87 44.6,121.87 43.46,123.01 41.67,123.01 40.92,123.76 v1(39.8,123.76)
  BOTTOM w0.18: R8_1.1 40.52,123.71 40.47,123.76 v1(39.8,123.76) 35.26,123.76 35.22,123.71 C8_1.2 C6_1.2
VDD_PAD_1: length 27.2
  TOP w0.18: v1(69.7,124.76) 71.98,124.76 U1_1.236 76.67,124.75 78.38,126.46 80.65,126.46 81.93,125.18 81.93,122.9 84.21,120.61 LK4_1.1
  BOTTOM w0.18: v1(69.7,124.76) C4_1.2 R6_1.1
VDD_SS_1: length 26.2
  TOP w0.18: LK9_1.1 79.9,114.52 77.16,117.25 U1_1.221 69.79,117.25 v1(69.75,117.21)
  BOTTOM w0.18: 68.25,116.62 68.25,116.68 68.13,116.8 66.42,116.8 66.24,116.62 R11_1.1 ; 68.25,116.62 68.85,117.21 v1(69.75,117.21) ; 68.25,116.62 C10_1.2
VDD_W_1: length 32.2
  TOP w0.18: U1_1.83 39.43,115.75 39.71,116.03 39.71,116.7 40.2,117.19 v1(42.35,117.19)
  L3 w0.18: v1(42.35,117.19) 37.35,117.19 34.12,120.41 32.14,120.41 27.37,125.18 LK8_1.1
  BOTTOM w0.18: C9_1.2 R10_1.1 42.71,117.17 42.7,117.19 v1(42.35,117.19)
VDD_WILK_1: length 14.2
  TOP w0.18: U1_1.100 v1(35.65,107.25)
  L3 w0.18: v1(35.65,107.25) 34.48,107.25 33.71,106.48 29.44,106.48 28.84,105.88 LK12_1.1
  BOTTOM w0.18: v1(35.65,107.25) 34.74,107.25 R12_1.1 C11_1.2
VDDD2_1: length 14.6
  TOP w0.18: U1_1.113 36.41,100.75 36.26,100.59 v1(35.58,100.59)
  L3 w0.18: LK2_1.1 28.24,99.78 28.31,99.71 28.89,99.71 28.96,99.78 32.66,99.78 33.47,100.59 v1(35.58,100.59)
  BOTTOM w0.18: C2_1.2 34.7,100.72 R4_1.2 34.8,100.59 v1(35.58,100.59)
VDDD_1: length 24.8
  TOP w0.18: v1(69.93,99.25) U1_1.185 75.53,99.25 78.81,95.97 79.17,95.97 79.21,95.94 80.08,95.94 80.11,95.97 80.66,95.97 82.94,98.26 LK1_1.1
  BOTTOM w0.18: R3_1.2 68.45,98.26 68.45,98.55 68.7,98.8 68.7,98.91 69,99.22 C1_1.1 69.04,99.25 v1(69.93,99.25)
ADC_DAV_1: length 12
  BOTTOM w0.18: LK54_1.1 43.07,91.54 43.08,91.56 43.08,95.16 44.91,96.99 44.91,98.76 43.91,99.76 R18_1.1
ANALOG_TO_MAROC<0>: length 33.8
  TOP w0.18: U1_1.238 74.05,125.75 74.46,126.16 74.46,130.57 75.17,131.27 78.97,131.27 87.25,139.55 91.31,139.55 94.79,143.03 94.79,144.31
ANALOG_TO_MAROC<1>: length 32.6
  TOP w0.18: 93.99,144.31 93.99,143.01 91.13,140.15 87.34,140.15 78.83,131.65 74.76,131.65 74,130.89 74,126.82 73.44,126.25 U1_1.239
ANALOG_TO_MAROC<2>: length 31.7
  TOP w0.18: U1_1.240 71.99,131.21 72.84,132.06 78.74,132.06 87.43,140.75 90.71,140.75 93.19,143.23 93.19,144.31
ANALOG_TO_MAROC<3>: length 30.9
  TOP w0.18: U1_1.1 69.75,131.56 70.66,132.47 78.61,132.47 87.49,141.35 90.21,141.35 92.39,143.53 92.39,144.31
ANALOG_TO_MAROC<4>: length 29.2
  TOP w0.18: 89.77,144.31 89.77,142.91 88.71,141.85 87.48,141.85 78.46,132.83 70.51,132.83 69.25,131.57 U1_1.2
ANALOG_TO_MAROC<5>: length 28.8
  TOP w0.18: U1_1.3 68.75,131.58 70.36,133.19 78.31,133.19 87.47,142.35 88.21,142.35 88.97,143.11 88.97,144.31
